# EAGLE board Qwiic RGB Sensor - BH1749-Panel (EAGLE 9.6.0), part 1 of 4
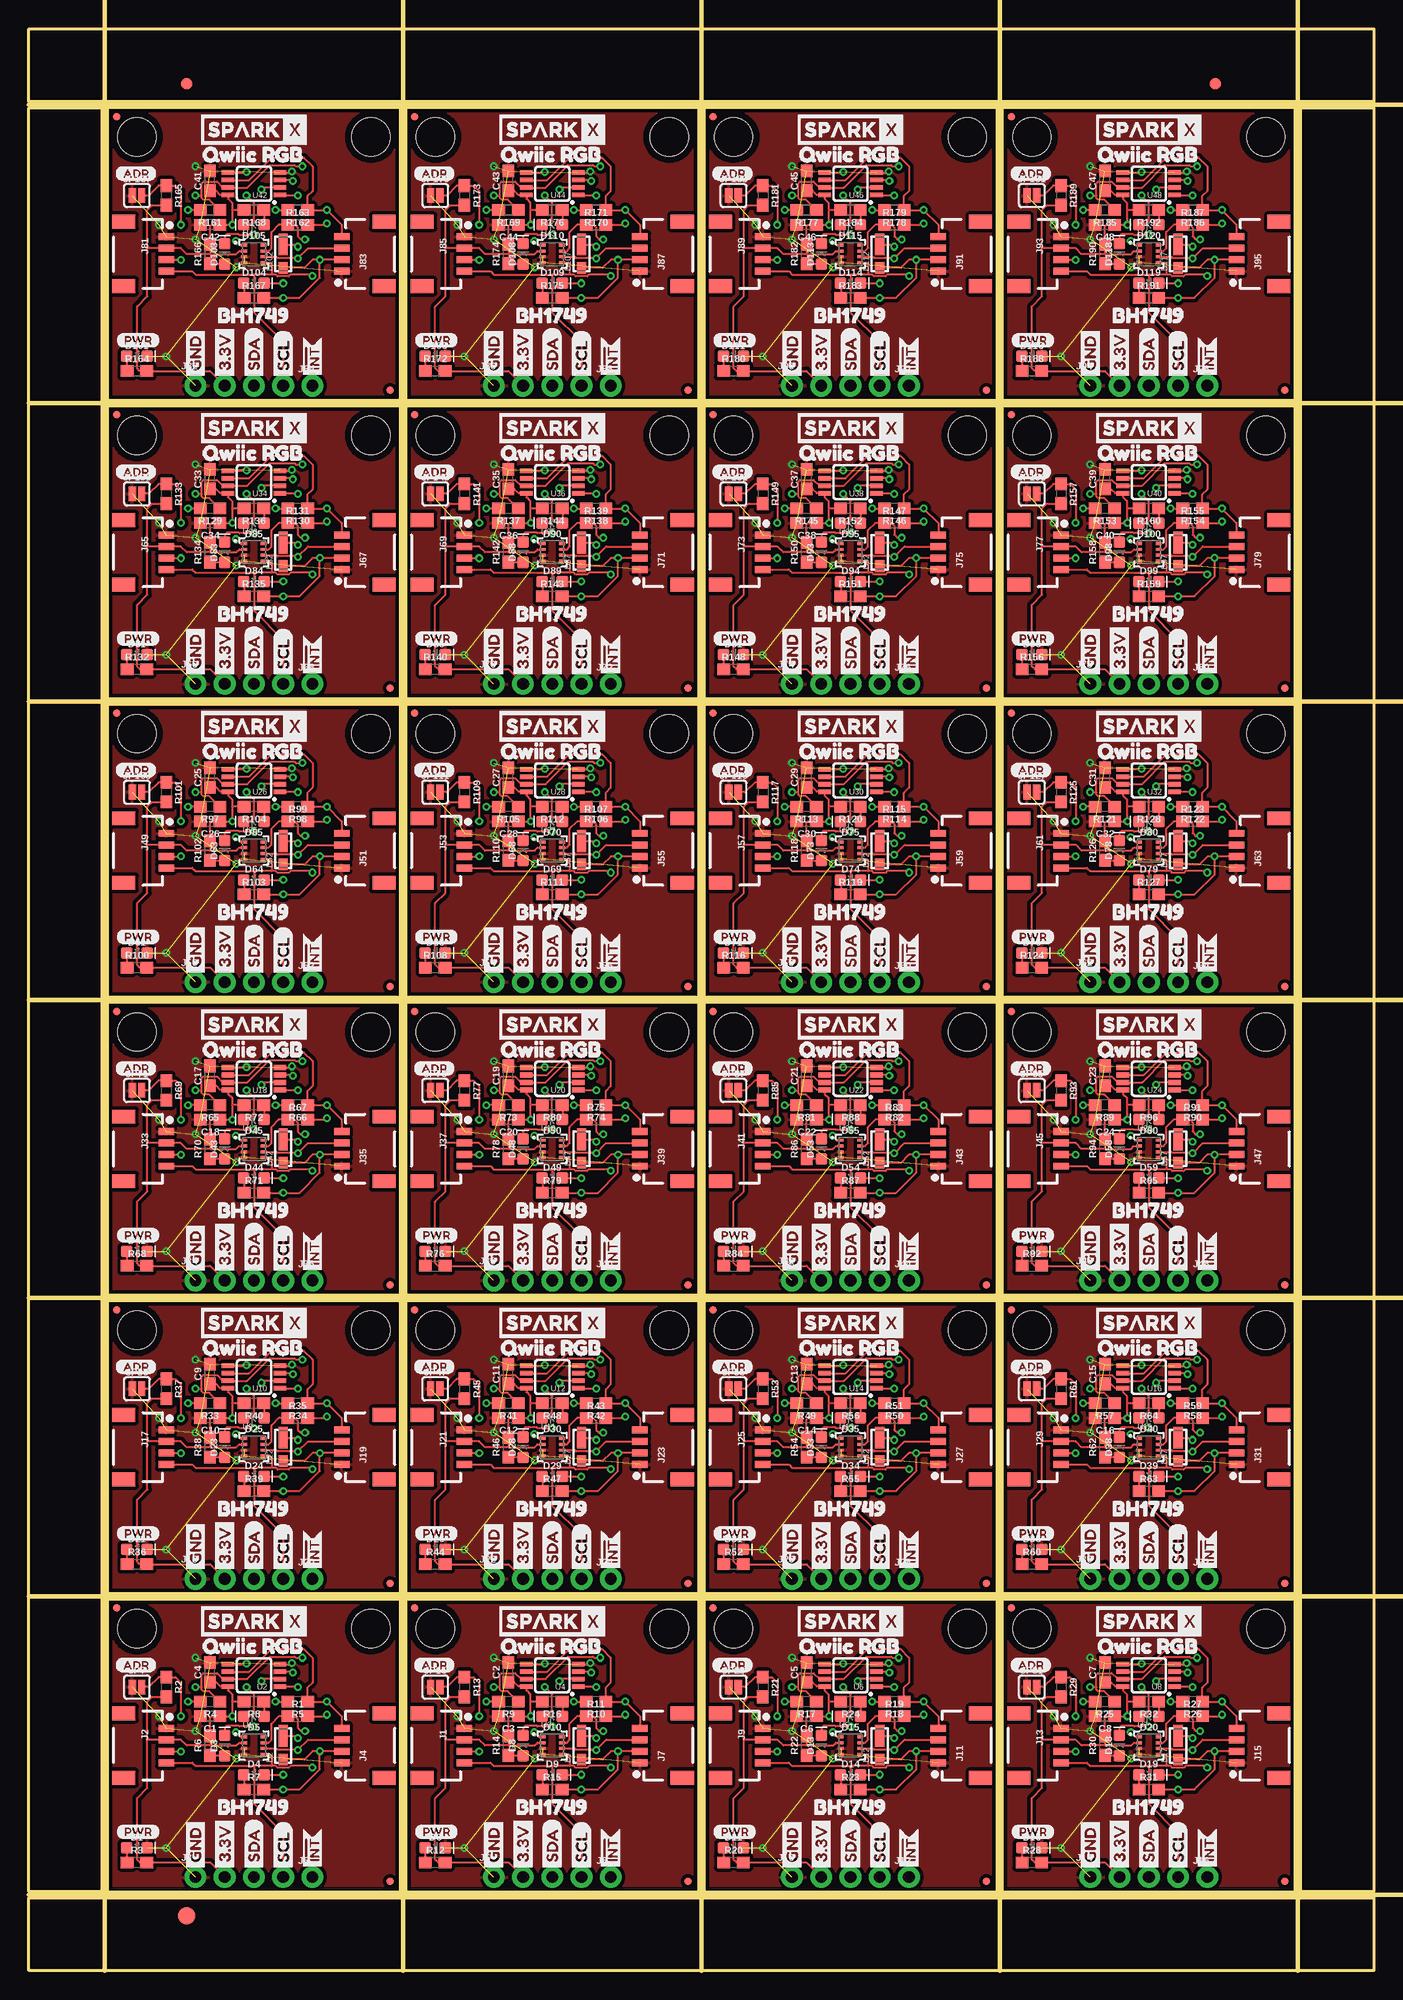
[diagram p0: board, top side]
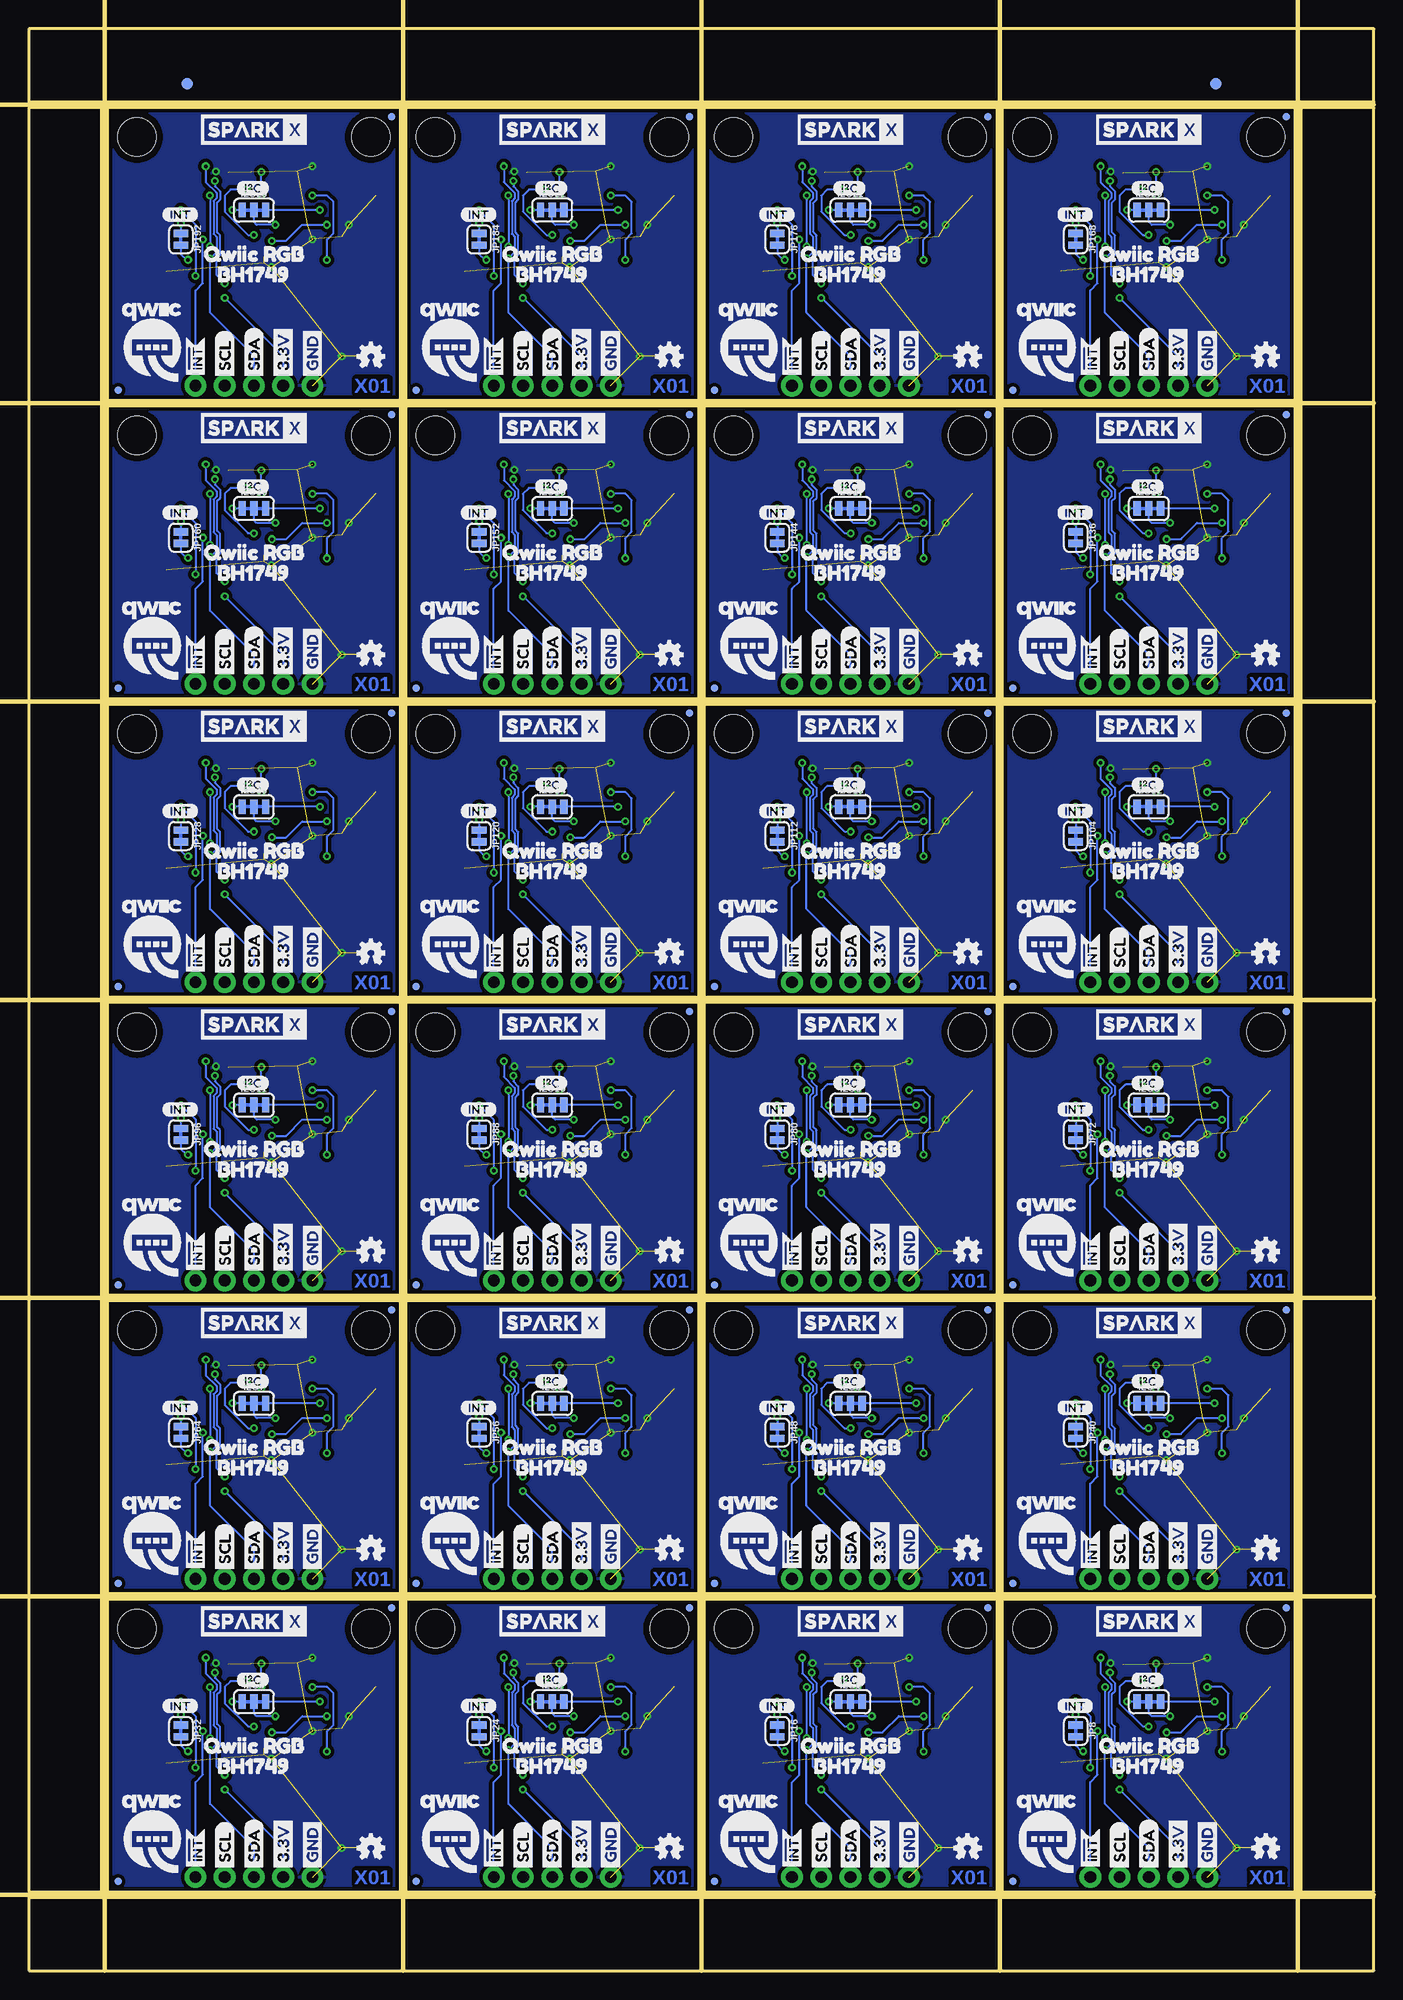
[diagram p1: board, bottom side, seen from below]

Size 116.84 x 168.66 mm. Coordinates in mm from the lower left corner, seen from the top.
Outline: 6.86,6.86 6.86,32.26 32.26,32.26 32.26,6.86 6.86,6.86
Outline: 32.77,6.86 32.77,32.26 58.17,32.26 58.17,6.86 32.77,6.86
Outline: 58.67,6.86 58.67,32.26 84.07,32.26 84.07,6.86 58.67,6.86
Outline: 84.58,6.86 84.58,32.26 109.98,32.26 109.98,6.86 84.58,6.86
Outline: 6.86,32.77 6.86,58.17 32.26,58.17 32.26,32.77 6.86,32.77
Outline: 32.77,32.77 32.77,58.17 58.17,58.17 58.17,32.77 32.77,32.77
Outline: 58.67,32.77 58.67,58.17 84.07,58.17 84.07,32.77 58.67,32.77
Outline: 84.58,32.77 84.58,58.17 109.98,58.17 109.98,32.77 84.58,32.77
Outline: 6.86,58.67 6.86,84.07 32.26,84.07 32.26,58.67 6.86,58.67
Outline: 32.77,58.67 32.77,84.07 58.17,84.07 58.17,58.67 32.77,58.67
Outline: 58.67,58.67 58.67,84.07 84.07,84.07 84.07,58.67 58.67,58.67
Outline: 84.58,58.67 84.58,84.07 109.98,84.07 109.98,58.67 84.58,58.67
Outline: 6.86,84.58 6.86,109.98 32.26,109.98 32.26,84.58 6.86,84.58
Outline: 32.77,84.58 32.77,109.98 58.17,109.98 58.17,84.58 32.77,84.58
Outline: 58.67,84.58 58.67,109.98 84.07,109.98 84.07,84.58 58.67,84.58
Outline: 84.58,84.58 84.58,109.98 109.98,109.98 109.98,84.58 84.58,84.58
Outline: 6.86,110.49 6.86,135.89 32.26,135.89 32.26,110.49 6.86,110.49
Outline: 32.77,110.49 32.77,135.89 58.17,135.89 58.17,110.49 32.77,110.49
Outline: 58.67,110.49 58.67,135.89 84.07,135.89 84.07,110.49 58.67,110.49
Outline: 84.58,110.49 84.58,135.89 109.98,135.89 109.98,110.49 84.58,110.49
Outline: 6.86,136.4 6.86,161.8 32.26,161.8 32.26,136.4 6.86,136.4
Outline: 32.77,136.4 32.77,161.8 58.17,161.8 58.17,136.4 32.77,136.4
Outline: 58.67,136.4 58.67,161.8 84.07,161.8 84.07,136.4 58.67,136.4
Outline: 84.58,136.4 84.58,161.8 109.98,161.8 109.98,136.4 84.58,136.4
Outline: 0,6.35 116.84,6.35 116.84,0 0,0 0,6.35
Outline: 110.49,161.8 116.84,161.8 116.84,6.86 110.49,6.86 110.49,161.8
Outline: 0,168.66 116.84,168.66 116.84,162.31 0,162.31 0,168.66
Outline: 0,161.8 6.35,161.8 6.35,6.86 0,6.86 0,161.8
Copper layers (1*16): Top 0.035mm / dielectric 1.5mm / Bottom 0.035mm
Design rules "Qwiic": minimum track width 6mil, minimum drill 0.3mm, track to track 6mil, track to pad 6mil, pad to pad 6mil, via to via 6mil, smd to smd 6mil, copper to edge 6mil, drill to drill 6mil, minimum pad ring 7mil, minimum via ring 7mil, stop-mask expansion 4mil, vias tented up to drill 25mil, thermal gap 10mil
Milling: 12 lines

## Footprints (pad centres in the part's own frame; a part is rotated, then mirrored left to right if it is on the bottom)
0603 = smd 1.1 x 1: 1 -0.85,0; 2 0.85,0
LED-0603 = smd 1 x 1: A -0.877,0; C 0.877,0
SUPER_BRIGHT_SMD_LED_1206 = smd 1 x 0.8: A -1.2,0 | smd 1.9 x 0.8: C 0.827,0
FIDUCIAL-1X2 = smd 1 x 1: 1 0,0
FIDUCIAL-1.5X3 = smd 1.5 x 1.5: 1 0,0
SMT-JUMPER_3_2-NC_TRACE_SILK = smd 0.635 x 1.27: 1 -1.016,0; 2 0,0; 3 1.016,0
1X04_1MM_RA = smd 0.6 x 1.35: 1 -1.5,0; 2 -0.5,0; 3 0.5,0; 4 1.5,0 | smd 1.2 x 2: NC1 2.8,-3.675; NC2 -2.8,-3.675
1X04_NO_SILK = drill 1.016 pad 1.88: 1 0,0; 2 2.54,0; 3 5.08,0; 4 7.62,0
1X01_NO_SILK = drill 1.016 pad 1.88: 1 0,0
MICRO-FIDUCIAL = smd 0.635 x 0.635: 1 0,0
STAND-OFF = hole 3.302: 0,0
SMT-JUMPER_2_NO_SILK = smd 0.635 x 1.27: 1 -0.406,0; 2 0.406,0
SMT-JUMPER_2_NC_TRACE_SILK = smd 0.635 x 1.27: 1 -0.508,0; 2 0.508,0
BH1749NUC = smd 0.5 x 0.25: 1 -0.85,0.75; 2 -0.85,0.25; 3 -0.85,-0.25; 4 -0.85,-0.75; 5 0.85,-0.75; 6 0.85,-0.25; 7 0.85,0.25; 8 0.85,0.75
MSOP8 = smd 1.1 x 0.4: 1 -2.25,0.975; 2 -2.25,0.325; 3 -2.25,-0.325; 4 -2.25,-0.975; 5 2.25,-0.975; 6 2.25,-0.325; 7 2.25,0.325; 8 2.25,0.975

## Placement (x,y rotation side)
C1  0.1uF  [0603]  15.75,22.1 180 top
C2  0.1uF  [0603]  41.66,25.91 90 top
C3  0.1uF  [0603]  41.66,22.1 180 top
C4  0.1uF  [0603]  15.75,25.91 90 top
C5  0.1uF  [0603]  67.56,25.91 90 top
C6  0.1uF  [0603]  67.56,22.1 180 top
C7  0.1uF  [0603]  93.47,25.91 90 top
C8  0.1uF  [0603]  93.47,22.1 180 top
C9  0.1uF  [0603]  15.75,51.82 90 top
C10  0.1uF  [0603]  15.75,48.01 180 top
C11  0.1uF  [0603]  41.66,51.82 90 top
C12  0.1uF  [0603]  41.66,48.01 180 top
C13  0.1uF  [0603]  67.56,51.82 90 top
C14  0.1uF  [0603]  67.56,48.01 180 top
C15  0.1uF  [0603]  93.47,51.82 90 top
C16  0.1uF  [0603]  93.47,48.01 180 top
C17  0.1uF  [0603]  15.75,77.72 90 top
C18  0.1uF  [0603]  15.75,73.91 180 top
C19  0.1uF  [0603]  41.66,77.72 90 top
C20  0.1uF  [0603]  41.66,73.91 180 top
C21  0.1uF  [0603]  67.56,77.72 90 top
C22  0.1uF  [0603]  67.56,73.91 180 top
C23  0.1uF  [0603]  93.47,77.72 90 top
C24  0.1uF  [0603]  93.47,73.91 180 top
C25  0.1uF  [0603]  15.75,103.63 90 top
C26  0.1uF  [0603]  15.75,99.82 180 top
C27  0.1uF  [0603]  41.66,103.63 90 top
C28  0.1uF  [0603]  41.66,99.82 180 top
C29  0.1uF  [0603]  67.56,103.63 90 top
C30  0.1uF  [0603]  67.56,99.82 180 top
C31  0.1uF  [0603]  93.47,103.63 90 top
C32  0.1uF  [0603]  93.47,99.82 180 top
C33  0.1uF  [0603]  15.75,129.54 90 top
C34  0.1uF  [0603]  15.75,125.73 180 top
C35  0.1uF  [0603]  41.66,129.54 90 top
C36  0.1uF  [0603]  41.66,125.73 180 top
C37  0.1uF  [0603]  67.56,129.54 90 top
C38  0.1uF  [0603]  67.56,125.73 180 top
C39  0.1uF  [0603]  93.47,129.54 90 top
C40  0.1uF  [0603]  93.47,125.73 180 top
C41  0.1uF  [0603]  15.75,155.45 90 top
C42  0.1uF  [0603]  15.75,151.64 180 top
C43  0.1uF  [0603]  41.66,155.45 90 top
C44  0.1uF  [0603]  41.66,151.64 180 top
C45  0.1uF  [0603]  67.56,155.45 90 top
C46  0.1uF  [0603]  67.56,151.64 180 top
C47  0.1uF  [0603]  93.47,155.45 90 top
C48  0.1uF  [0603]  93.47,151.64 180 top
D1  RED  [LED-0603]  9.4,10.67 0 top
D2  5700k  [SUPER_BRIGHT_SMD_LED_1206]  22.1,19.56 90 top
D3  RED  [LED-0603]  17.02,19.56 90 top
D4  GREEN  [LED-0603]  19.56,17.02 0 top
D5  BLUE  [LED-0603]  19.56,22.1 180 top
D6  RED  [LED-0603]  35.31,10.67 0 top
D7  5700k  [SUPER_BRIGHT_SMD_LED_1206]  48.01,19.56 90 top
D8  RED  [LED-0603]  42.93,19.56 90 top
D9  GREEN  [LED-0603]  45.47,17.02 0 top
D10  BLUE  [LED-0603]  45.47,22.1 180 top
D11  RED  [LED-0603]  61.21,10.67 0 top
D12  5700k  [SUPER_BRIGHT_SMD_LED_1206]  73.91,19.56 90 top
D13  RED  [LED-0603]  68.83,19.56 90 top
D14  GREEN  [LED-0603]  71.37,17.02 0 top
D15  BLUE  [LED-0603]  71.37,22.1 180 top
D16  RED  [LED-0603]  87.12,10.67 0 top
D17  5700k  [SUPER_BRIGHT_SMD_LED_1206]  99.82,19.56 90 top
D18  RED  [LED-0603]  94.74,19.56 90 top
D19  GREEN  [LED-0603]  97.28,17.02 0 top
D20  BLUE  [LED-0603]  97.28,22.1 180 top
D21  RED  [LED-0603]  9.4,36.58 0 top
D22  5700k  [SUPER_BRIGHT_SMD_LED_1206]  22.1,45.47 90 top
D23  RED  [LED-0603]  17.02,45.47 90 top
D24  GREEN  [LED-0603]  19.56,42.93 0 top
D25  BLUE  [LED-0603]  19.56,48.01 180 top
D26  RED  [LED-0603]  35.31,36.58 0 top
D27  5700k  [SUPER_BRIGHT_SMD_LED_1206]  48.01,45.47 90 top
D28  RED  [LED-0603]  42.93,45.47 90 top
D29  GREEN  [LED-0603]  45.47,42.93 0 top
D30  BLUE  [LED-0603]  45.47,48.01 180 top
D31  RED  [LED-0603]  61.21,36.58 0 top
D32  5700k  [SUPER_BRIGHT_SMD_LED_1206]  73.91,45.47 90 top
D33  RED  [LED-0603]  68.83,45.47 90 top
D34  GREEN  [LED-0603]  71.37,42.93 0 top
D35  BLUE  [LED-0603]  71.37,48.01 180 top
D36  RED  [LED-0603]  87.12,36.58 0 top
D37  5700k  [SUPER_BRIGHT_SMD_LED_1206]  99.82,45.47 90 top
D38  RED  [LED-0603]  94.74,45.47 90 top
D39  GREEN  [LED-0603]  97.28,42.93 0 top
D40  BLUE  [LED-0603]  97.28,48.01 180 top
D41  RED  [LED-0603]  9.4,62.48 0 top
D42  5700k  [SUPER_BRIGHT_SMD_LED_1206]  22.1,71.37 90 top
D43  RED  [LED-0603]  17.02,71.37 90 top
D44  GREEN  [LED-0603]  19.56,68.83 0 top
D45  BLUE  [LED-0603]  19.56,73.91 180 top
D46  RED  [LED-0603]  35.31,62.48 0 top
D47  5700k  [SUPER_BRIGHT_SMD_LED_1206]  48.01,71.37 90 top
D48  RED  [LED-0603]  42.93,71.37 90 top
D49  GREEN  [LED-0603]  45.47,68.83 0 top
D50  BLUE  [LED-0603]  45.47,73.91 180 top
D51  RED  [LED-0603]  61.21,62.48 0 top
D52  5700k  [SUPER_BRIGHT_SMD_LED_1206]  73.91,71.37 90 top
D53  RED  [LED-0603]  68.83,71.37 90 top
D54  GREEN  [LED-0603]  71.37,68.83 0 top
D55  BLUE  [LED-0603]  71.37,73.91 180 top
D56  RED  [LED-0603]  87.12,62.48 0 top
D57  5700k  [SUPER_BRIGHT_SMD_LED_1206]  99.82,71.37 90 top
D58  RED  [LED-0603]  94.74,71.37 90 top
D59  GREEN  [LED-0603]  97.28,68.83 0 top
D60  BLUE  [LED-0603]  97.28,73.91 180 top
D61  RED  [LED-0603]  9.4,88.39 0 top
D62  5700k  [SUPER_BRIGHT_SMD_LED_1206]  22.1,97.28 90 top
D63  RED  [LED-0603]  17.02,97.28 90 top
D64  GREEN  [LED-0603]  19.56,94.74 0 top
D65  BLUE  [LED-0603]  19.56,99.82 180 top
D66  RED  [LED-0603]  35.31,88.39 0 top
D67  5700k  [SUPER_BRIGHT_SMD_LED_1206]  48.01,97.28 90 top
D68  RED  [LED-0603]  42.93,97.28 90 top
D69  GREEN  [LED-0603]  45.47,94.74 0 top
D70  BLUE  [LED-0603]  45.47,99.82 180 top
D71  RED  [LED-0603]  61.21,88.39 0 top
D72  5700k  [SUPER_BRIGHT_SMD_LED_1206]  73.91,97.28 90 top
D73  RED  [LED-0603]  68.83,97.28 90 top
D74  GREEN  [LED-0603]  71.37,94.74 0 top
D75  BLUE  [LED-0603]  71.37,99.82 180 top
D76  RED  [LED-0603]  87.12,88.39 0 top
D77  5700k  [SUPER_BRIGHT_SMD_LED_1206]  99.82,97.28 90 top
D78  RED  [LED-0603]  94.74,97.28 90 top
D79  GREEN  [LED-0603]  97.28,94.74 0 top
D80  BLUE  [LED-0603]  97.28,99.82 180 top
D81  RED  [LED-0603]  9.4,114.3 0 top
D82  5700k  [SUPER_BRIGHT_SMD_LED_1206]  22.1,123.19 90 top
D83  RED  [LED-0603]  17.02,123.19 90 top
D84  GREEN  [LED-0603]  19.56,120.65 0 top
D85  BLUE  [LED-0603]  19.56,125.73 180 top
D86  RED  [LED-0603]  35.31,114.3 0 top
D87  5700k  [SUPER_BRIGHT_SMD_LED_1206]  48.01,123.19 90 top
D88  RED  [LED-0603]  42.93,123.19 90 top
D89  GREEN  [LED-0603]  45.47,120.65 0 top
D90  BLUE  [LED-0603]  45.47,125.73 180 top
D91  RED  [LED-0603]  61.21,114.3 0 top
D92  5700k  [SUPER_BRIGHT_SMD_LED_1206]  73.91,123.19 90 top
D93  RED  [LED-0603]  68.83,123.19 90 top
D94  GREEN  [LED-0603]  71.37,120.65 0 top
D95  BLUE  [LED-0603]  71.37,125.73 180 top
D96  RED  [LED-0603]  87.12,114.3 0 top
D97  5700k  [SUPER_BRIGHT_SMD_LED_1206]  99.82,123.19 90 top
D98  RED  [LED-0603]  94.74,123.19 90 top
D99  GREEN  [LED-0603]  97.28,120.65 0 top
D100  BLUE  [LED-0603]  97.28,125.73 180 top
D101  RED  [LED-0603]  9.4,140.21 0 top
D102  5700k  [SUPER_BRIGHT_SMD_LED_1206]  22.1,149.1 90 top
D103  RED  [LED-0603]  17.02,149.1 90 top
D104  GREEN  [LED-0603]  19.56,146.56 0 top
D105  BLUE  [LED-0603]  19.56,151.64 180 top
D106  RED  [LED-0603]  35.31,140.21 0 top
D107  5700k  [SUPER_BRIGHT_SMD_LED_1206]  48.01,149.1 90 top
D108  RED  [LED-0603]  42.93,149.1 90 top
D109  GREEN  [LED-0603]  45.47,146.56 0 top
D110  BLUE  [LED-0603]  45.47,151.64 180 top
D111  RED  [LED-0603]  61.21,140.21 0 top
D112  5700k  [SUPER_BRIGHT_SMD_LED_1206]  73.91,149.1 90 top
D113  RED  [LED-0603]  68.83,149.1 90 top
D114  GREEN  [LED-0603]  71.37,146.56 0 top
D115  BLUE  [LED-0603]  71.37,151.64 180 top
D116  RED  [LED-0603]  87.12,140.21 0 top
D117  5700k  [SUPER_BRIGHT_SMD_LED_1206]  99.82,149.1 90 top
D118  RED  [LED-0603]  94.74,149.1 90 top
D119  GREEN  [LED-0603]  97.28,146.56 0 top
D120  BLUE  [LED-0603]  97.28,151.64 180 top
E$1  [FIDUCIAL-1X2]  13.72,163.89 0 top
E$2  [FIDUCIAL-1X2]  13.72,163.89 0 bottom
E$3  [FIDUCIAL-1X2]  103.06,163.89 0 top
E$4  [FIDUCIAL-1X2]  103.06,163.89 0 bottom
E$5  [FIDUCIAL-1.5X3]  13.72,4.76 0 top
I2C  [SMT-JUMPER_3_2-NC_TRACE_SILK]  19.56,23.37 0 bottom
I2C1  [SMT-JUMPER_3_2-NC_TRACE_SILK]  45.47,23.37 0 bottom
I2C2  [SMT-JUMPER_3_2-NC_TRACE_SILK]  71.37,23.37 0 bottom
I2C3  [SMT-JUMPER_3_2-NC_TRACE_SILK]  97.28,23.37 0 bottom
I2C4  [SMT-JUMPER_3_2-NC_TRACE_SILK]  19.56,49.28 0 bottom
I2C5  [SMT-JUMPER_3_2-NC_TRACE_SILK]  45.47,49.28 0 bottom
I2C6  [SMT-JUMPER_3_2-NC_TRACE_SILK]  71.37,49.28 0 bottom
I2C7  [SMT-JUMPER_3_2-NC_TRACE_SILK]  97.28,49.28 0 bottom
I2C8  [SMT-JUMPER_3_2-NC_TRACE_SILK]  19.56,75.18 0 bottom
I2C9  [SMT-JUMPER_3_2-NC_TRACE_SILK]  45.47,75.18 0 bottom
I2C10  [SMT-JUMPER_3_2-NC_TRACE_SILK]  71.37,75.18 0 bottom
I2C11  [SMT-JUMPER_3_2-NC_TRACE_SILK]  97.28,75.18 0 bottom
I2C12  [SMT-JUMPER_3_2-NC_TRACE_SILK]  19.56,101.09 0 bottom
I2C13  [SMT-JUMPER_3_2-NC_TRACE_SILK]  45.47,101.09 0 bottom
I2C14  [SMT-JUMPER_3_2-NC_TRACE_SILK]  71.37,101.09 0 bottom
I2C15  [SMT-JUMPER_3_2-NC_TRACE_SILK]  97.28,101.09 0 bottom
I2C16  [SMT-JUMPER_3_2-NC_TRACE_SILK]  19.56,127 0 bottom
I2C17  [SMT-JUMPER_3_2-NC_TRACE_SILK]  45.47,127 0 bottom
I2C18  [SMT-JUMPER_3_2-NC_TRACE_SILK]  71.37,127 0 bottom
I2C19  [SMT-JUMPER_3_2-NC_TRACE_SILK]  97.28,127 0 bottom
I2C20  [SMT-JUMPER_3_2-NC_TRACE_SILK]  19.56,152.91 0 bottom
I2C21  [SMT-JUMPER_3_2-NC_TRACE_SILK]  45.47,152.91 0 bottom
I2C22  [SMT-JUMPER_3_2-NC_TRACE_SILK]  71.37,152.91 0 bottom
I2C23  [SMT-JUMPER_3_2-NC_TRACE_SILK]  97.28,152.91 0 bottom
J1  SMD  [1X04_1MM_RA]  37.85,19.56 270 top
J2  SMD  [1X04_1MM_RA]  11.94,19.56 270 top
J3  PTH  [1X04_NO_SILK]  14.48,8.13 0 top
J4  SMD  [1X04_1MM_RA]  27.18,19.56 90 top
J5  [1X01_NO_SILK]  24.64,8.13 0 top
J6  PTH  [1X04_NO_SILK]  40.39,8.13 0 top
J7  SMD  [1X04_1MM_RA]  53.09,19.56 90 top
J8  [1X01_NO_SILK]  50.55,8.13 0 top
J9  SMD  [1X04_1MM_RA]  63.75,19.56 270 top
J10  PTH  [1X04_NO_SILK]  66.29,8.13 0 top
J11  SMD  [1X04_1MM_RA]  78.99,19.56 90 top
J12  [1X01_NO_SILK]  76.45,8.13 0 top
J13  SMD  [1X04_1MM_RA]  89.66,19.56 270 top
J14  PTH  [1X04_NO_SILK]  92.2,8.13 0 top
J15  SMD  [1X04_1MM_RA]  104.9,19.56 90 top
J16  [1X01_NO_SILK]  102.36,8.13 0 top
J17  SMD  [1X04_1MM_RA]  11.94,45.47 270 top
J18  PTH  [1X04_NO_SILK]  14.48,34.04 0 top
J19  SMD  [1X04_1MM_RA]  27.18,45.47 90 top
J20  [1X01_NO_SILK]  24.64,34.04 0 top
J21  SMD  [1X04_1MM_RA]  37.85,45.47 270 top
J22  PTH  [1X04_NO_SILK]  40.39,34.04 0 top
J23  SMD  [1X04_1MM_RA]  53.09,45.47 90 top
J24  [1X01_NO_SILK]  50.55,34.04 0 top
J25  SMD  [1X04_1MM_RA]  63.75,45.47 270 top
J26  PTH  [1X04_NO_SILK]  66.29,34.04 0 top
J27  SMD  [1X04_1MM_RA]  78.99,45.47 90 top
J28  [1X01_NO_SILK]  76.45,34.04 0 top
J29  SMD  [1X04_1MM_RA]  89.66,45.47 270 top
J30  PTH  [1X04_NO_SILK]  92.2,34.04 0 top
J31  SMD  [1X04_1MM_RA]  104.9,45.47 90 top
J32  [1X01_NO_SILK]  102.36,34.04 0 top
J33  SMD  [1X04_1MM_RA]  11.94,71.37 270 top
J34  PTH  [1X04_NO_SILK]  14.48,59.94 0 top
J35  SMD  [1X04_1MM_RA]  27.18,71.37 90 top
J36  [1X01_NO_SILK]  24.64,59.94 0 top
J37  SMD  [1X04_1MM_RA]  37.85,71.37 270 top
J38  PTH  [1X04_NO_SILK]  40.39,59.94 0 top
J39  SMD  [1X04_1MM_RA]  53.09,71.37 90 top
J40  [1X01_NO_SILK]  50.55,59.94 0 top
J41  SMD  [1X04_1MM_RA]  63.75,71.37 270 top
J42  PTH  [1X04_NO_SILK]  66.29,59.94 0 top
J43  SMD  [1X04_1MM_RA]  78.99,71.37 90 top
J44  [1X01_NO_SILK]  76.45,59.94 0 top
J45  SMD  [1X04_1MM_RA]  89.66,71.37 270 top
J46  PTH  [1X04_NO_SILK]  92.2,59.94 0 top
J47  SMD  [1X04_1MM_RA]  104.9,71.37 90 top
J48  [1X01_NO_SILK]  102.36,59.94 0 top
J49  SMD  [1X04_1MM_RA]  11.94,97.28 270 top
J50  PTH  [1X04_NO_SILK]  14.48,85.85 0 top
J51  SMD  [1X04_1MM_RA]  27.18,97.28 90 top
J52  [1X01_NO_SILK]  24.64,85.85 0 top
J53  SMD  [1X04_1MM_RA]  37.85,97.28 270 top
J54  PTH  [1X04_NO_SILK]  40.39,85.85 0 top
J55  SMD  [1X04_1MM_RA]  53.09,97.28 90 top
J56  [1X01_NO_SILK]  50.55,85.85 0 top
J57  SMD  [1X04_1MM_RA]  63.75,97.28 270 top
J58  PTH  [1X04_NO_SILK]  66.29,85.85 0 top
J59  SMD  [1X04_1MM_RA]  78.99,97.28 90 top
J60  [1X01_NO_SILK]  76.45,85.85 0 top
J61  SMD  [1X04_1MM_RA]  89.66,97.28 270 top
J62  PTH  [1X04_NO_SILK]  92.2,85.85 0 top
J63  SMD  [1X04_1MM_RA]  104.9,97.28 90 top
J64  [1X01_NO_SILK]  102.36,85.85 0 top
J65  SMD  [1X04_1MM_RA]  11.94,123.19 270 top
J66  PTH  [1X04_NO_SILK]  14.48,111.76 0 top
J67  SMD  [1X04_1MM_RA]  27.18,123.19 90 top
J68  [1X01_NO_SILK]  24.64,111.76 0 top
J69  SMD  [1X04_1MM_RA]  37.85,123.19 270 top
J70  PTH  [1X04_NO_SILK]  40.39,111.76 0 top
J71  SMD  [1X04_1MM_RA]  53.09,123.19 90 top
J72  [1X01_NO_SILK]  50.55,111.76 0 top
J73  SMD  [1X04_1MM_RA]  63.75,123.19 270 top
J74  PTH  [1X04_NO_SILK]  66.29,111.76 0 top
J75  SMD  [1X04_1MM_RA]  78.99,123.19 90 top
J76  [1X01_NO_SILK]  76.45,111.76 0 top
J77  SMD  [1X04_1MM_RA]  89.66,123.19 270 top
J78  PTH  [1X04_NO_SILK]  92.2,111.76 0 top
J79  SMD  [1X04_1MM_RA]  104.9,123.19 90 top
J80  [1X01_NO_SILK]  102.36,111.76 0 top
J81  SMD  [1X04_1MM_RA]  11.94,149.1 270 top
J82  PTH  [1X04_NO_SILK]  14.48,137.67 0 top
J83  SMD  [1X04_1MM_RA]  27.18,149.1 90 top
J84  [1X01_NO_SILK]  24.64,137.67 0 top
J85  SMD  [1X04_1MM_RA]  37.85,149.1 270 top
J86  PTH  [1X04_NO_SILK]  40.39,137.67 0 top
J87  SMD  [1X04_1MM_RA]  53.09,149.1 90 top
J88  [1X01_NO_SILK]  50.55,137.67 0 top
J89  SMD  [1X04_1MM_RA]  63.75,149.1 270 top
J90  PTH  [1X04_NO_SILK]  66.29,137.67 0 top
J91  SMD  [1X04_1MM_RA]  78.99,149.1 90 top
J92  [1X01_NO_SILK]  76.45,137.67 0 top
J93  SMD  [1X04_1MM_RA]  89.66,149.1 270 top
J94  PTH  [1X04_NO_SILK]  92.2,137.67 0 top
J95  SMD  [1X04_1MM_RA]  104.9,149.1 90 top
J96  [1X01_NO_SILK]  102.36,137.67 0 top
JP1  FIDUCIALUFIDUCIAL  [MICRO-FIDUCIAL]  7.62,31.5 0 bottom
JP2  FIDUCIALUFIDUCIAL  [MICRO-FIDUCIAL]  31.37,7.75 0 top
JP3  STAND-OFF  [STAND-OFF]  9.4,29.72 0 top
JP4  STAND-OFF  [STAND-OFF]  29.72,29.72 0 top
JP5  FIDUCIALUFIDUCIAL  [MICRO-FIDUCIAL]  31.37,7.75 0 bottom
JP6  FIDUCIALUFIDUCIAL  [MICRO-FIDUCIAL]  7.62,31.5 0 top
JP7  ADR  [SMT-JUMPER_2_NO_SILK]  9.4,24.64 0 top
JP8  INT  [SMT-JUMPER_2_NC_TRACE_SILK]  25.91,20.83 270 bottom
JP9  STAND-OFF  [STAND-OFF]  35.31,29.72 0 top
JP10  STAND-OFF  [STAND-OFF]  55.63,29.72 0 top
JP11  FIDUCIALUFIDUCIAL  [MICRO-FIDUCIAL]  57.28,7.75 0 top
JP12  FIDUCIALUFIDUCIAL  [MICRO-FIDUCIAL]  33.53,31.5 0 top
JP13  FIDUCIALUFIDUCIAL  [MICRO-FIDUCIAL]  33.53,31.5 0 bottom
JP14  FIDUCIALUFIDUCIAL  [MICRO-FIDUCIAL]  57.28,7.75 0 bottom
JP15  ADR  [SMT-JUMPER_2_NO_SILK]  35.31,24.64 0 top
JP16  INT  [SMT-JUMPER_2_NC_TRACE_SILK]  51.82,20.83 270 bottom
JP17  STAND-OFF  [STAND-OFF]  61.21,29.72 0 top
JP18  STAND-OFF  [STAND-OFF]  81.53,29.72 0 top
JP19  FIDUCIALUFIDUCIAL  [MICRO-FIDUCIAL]  83.19,7.75 0 top
JP20  FIDUCIALUFIDUCIAL  [MICRO-FIDUCIAL]  59.44,31.5 0 top
JP21  FIDUCIALUFIDUCIAL  [MICRO-FIDUCIAL]  59.44,31.5 0 bottom
JP22  FIDUCIALUFIDUCIAL  [MICRO-FIDUCIAL]  83.19,7.75 0 bottom
JP23  ADR  [SMT-JUMPER_2_NO_SILK]  61.21,24.64 0 top
JP24  INT  [SMT-JUMPER_2_NC_TRACE_SILK]  77.72,20.83 270 bottom
JP25  STAND-OFF  [STAND-OFF]  87.12,29.72 0 top
JP26  STAND-OFF  [STAND-OFF]  107.44,29.72 0 top
JP27  FIDUCIALUFIDUCIAL  [MICRO-FIDUCIAL]  109.09,7.75 0 top
JP28  FIDUCIALUFIDUCIAL  [MICRO-FIDUCIAL]  85.34,31.5 0 top
JP29  FIDUCIALUFIDUCIAL  [MICRO-FIDUCIAL]  85.34,31.5 0 bottom
JP30  FIDUCIALUFIDUCIAL  [MICRO-FIDUCIAL]  109.09,7.75 0 bottom
JP31  ADR  [SMT-JUMPER_2_NO_SILK]  87.12,24.64 0 top
JP32  INT  [SMT-JUMPER_2_NC_TRACE_SILK]  103.63,20.83 270 bottom
JP33  STAND-OFF  [STAND-OFF]  9.4,55.63 0 top
JP34  STAND-OFF  [STAND-OFF]  29.72,55.63 0 top
JP35  FIDUCIALUFIDUCIAL  [MICRO-FIDUCIAL]  31.37,33.66 0 top
JP36  FIDUCIALUFIDUCIAL  [MICRO-FIDUCIAL]  7.62,57.4 0 top
JP37  FIDUCIALUFIDUCIAL  [MICRO-FIDUCIAL]  7.62,57.4 0 bottom
JP38  FIDUCIALUFIDUCIAL  [MICRO-FIDUCIAL]  31.37,33.66 0 bottom
JP39  ADR  [SMT-JUMPER_2_NO_SILK]  9.4,50.55 0 top
JP40  INT  [SMT-JUMPER_2_NC_TRACE_SILK]  25.91,46.74 270 bottom
JP41  STAND-OFF  [STAND-OFF]  35.31,55.63 0 top
JP42  STAND-OFF  [STAND-OFF]  55.63,55.63 0 top
JP43  FIDUCIALUFIDUCIAL  [MICRO-FIDUCIAL]  57.28,33.66 0 top
JP44  FIDUCIALUFIDUCIAL  [MICRO-FIDUCIAL]  33.53,57.4 0 top
JP45  FIDUCIALUFIDUCIAL  [MICRO-FIDUCIAL]  33.53,57.4 0 bottom
JP46  FIDUCIALUFIDUCIAL  [MICRO-FIDUCIAL]  57.28,33.66 0 bottom
JP47  ADR  [SMT-JUMPER_2_NO_SILK]  35.31,50.55 0 top
JP48  INT  [SMT-JUMPER_2_NC_TRACE_SILK]  51.82,46.74 270 bottom
JP49  STAND-OFF  [STAND-OFF]  61.21,55.63 0 top
JP50  STAND-OFF  [STAND-OFF]  81.53,55.63 0 top
JP51  FIDUCIALUFIDUCIAL  [MICRO-FIDUCIAL]  83.19,33.66 0 top
JP52  FIDUCIALUFIDUCIAL  [MICRO-FIDUCIAL]  59.44,57.4 0 top
JP53  FIDUCIALUFIDUCIAL  [MICRO-FIDUCIAL]  59.44,57.4 0 bottom
JP54  FIDUCIALUFIDUCIAL  [MICRO-FIDUCIAL]  83.19,33.66 0 bottom
JP55  ADR  [SMT-JUMPER_2_NO_SILK]  61.21,50.55 0 top
JP56  INT  [SMT-JUMPER_2_NC_TRACE_SILK]  77.72,46.74 270 bottom
JP57  STAND-OFF  [STAND-OFF]  87.12,55.63 0 top
JP58  STAND-OFF  [STAND-OFF]  107.44,55.63 0 top
JP59  FIDUCIALUFIDUCIAL  [MICRO-FIDUCIAL]  109.09,33.66 0 top
JP60  FIDUCIALUFIDUCIAL  [MICRO-FIDUCIAL]  85.34,57.4 0 top
JP61  FIDUCIALUFIDUCIAL  [MICRO-FIDUCIAL]  85.34,57.4 0 bottom
JP62  FIDUCIALUFIDUCIAL  [MICRO-FIDUCIAL]  109.09,33.66 0 bottom
JP63  ADR  [SMT-JUMPER_2_NO_SILK]  87.12,50.55 0 top
JP64  INT  [SMT-JUMPER_2_NC_TRACE_SILK]  103.63,46.74 270 bottom
JP65  STAND-OFF  [STAND-OFF]  9.4,81.53 0 top
JP66  STAND-OFF  [STAND-OFF]  29.72,81.53 0 top
JP67  FIDUCIALUFIDUCIAL  [MICRO-FIDUCIAL]  31.37,59.56 0 top
JP68  FIDUCIALUFIDUCIAL  [MICRO-FIDUCIAL]  7.62,83.31 0 top
JP69  FIDUCIALUFIDUCIAL  [MICRO-FIDUCIAL]  7.62,83.31 0 bottom
JP70  FIDUCIALUFIDUCIAL  [MICRO-FIDUCIAL]  31.37,59.56 0 bottom
JP71  ADR  [SMT-JUMPER_2_NO_SILK]  9.4,76.45 0 top
JP72  INT  [SMT-JUMPER_2_NC_TRACE_SILK]  25.91,72.64 270 bottom
JP73  STAND-OFF  [STAND-OFF]  35.31,81.53 0 top
JP74  STAND-OFF  [STAND-OFF]  55.63,81.53 0 top
JP75  FIDUCIALUFIDUCIAL  [MICRO-FIDUCIAL]  57.28,59.56 0 top
JP76  FIDUCIALUFIDUCIAL  [MICRO-FIDUCIAL]  33.53,83.31 0 top
JP77  FIDUCIALUFIDUCIAL  [MICRO-FIDUCIAL]  33.53,83.31 0 bottom
JP78  FIDUCIALUFIDUCIAL  [MICRO-FIDUCIAL]  57.28,59.56 0 bottom
JP79  ADR  [SMT-JUMPER_2_NO_SILK]  35.31,76.45 0 top
JP80  INT  [SMT-JUMPER_2_NC_TRACE_SILK]  51.82,72.64 270 bottom
JP81  STAND-OFF  [STAND-OFF]  61.21,81.53 0 top
JP82  STAND-OFF  [STAND-OFF]  81.53,81.53 0 top
JP83  FIDUCIALUFIDUCIAL  [MICRO-FIDUCIAL]  83.19,59.56 0 top
JP84  FIDUCIALUFIDUCIAL  [MICRO-FIDUCIAL]  59.44,83.31 0 top
JP85  FIDUCIALUFIDUCIAL  [MICRO-FIDUCIAL]  59.44,83.31 0 bottom
JP86  FIDUCIALUFIDUCIAL  [MICRO-FIDUCIAL]  83.19,59.56 0 bottom
JP87  ADR  [SMT-JUMPER_2_NO_SILK]  61.21,76.45 0 top
JP88  INT  [SMT-JUMPER_2_NC_TRACE_SILK]  77.72,72.64 270 bottom
JP89  STAND-OFF  [STAND-OFF]  87.12,81.53 0 top
JP90  STAND-OFF  [STAND-OFF]  107.44,81.53 0 top
JP91  FIDUCIALUFIDUCIAL  [MICRO-FIDUCIAL]  109.09,59.56 0 top
JP92  FIDUCIALUFIDUCIAL  [MICRO-FIDUCIAL]  85.34,83.31 0 top
JP93  FIDUCIALUFIDUCIAL  [MICRO-FIDUCIAL]  85.34,83.31 0 bottom
JP94  FIDUCIALUFIDUCIAL  [MICRO-FIDUCIAL]  109.09,59.56 0 bottom
JP95  ADR  [SMT-JUMPER_2_NO_SILK]  87.12,76.45 0 top
JP96  INT  [SMT-JUMPER_2_NC_TRACE_SILK]  103.63,72.64 270 bottom
JP97  STAND-OFF  [STAND-OFF]  9.4,107.44 0 top
JP98  STAND-OFF  [STAND-OFF]  29.72,107.44 0 top
JP99  FIDUCIALUFIDUCIAL  [MICRO-FIDUCIAL]  31.37,85.47 0 top
JP100  FIDUCIALUFIDUCIAL  [MICRO-FIDUCIAL]  7.62,109.22 0 top
JP101  FIDUCIALUFIDUCIAL  [MICRO-FIDUCIAL]  7.62,109.22 0 bottom
JP102  FIDUCIALUFIDUCIAL  [MICRO-FIDUCIAL]  31.37,85.47 0 bottom
JP103  ADR  [SMT-JUMPER_2_NO_SILK]  9.4,102.36 0 top
JP104  INT  [SMT-JUMPER_2_NC_TRACE_SILK]  25.91,98.55 270 bottom
JP105  STAND-OFF  [STAND-OFF]  35.31,107.44 0 top
JP106  STAND-OFF  [STAND-OFF]  55.63,107.44 0 top
JP107  FIDUCIALUFIDUCIAL  [MICRO-FIDUCIAL]  57.28,85.47 0 top
JP108  FIDUCIALUFIDUCIAL  [MICRO-FIDUCIAL]  33.53,109.22 0 top
JP109  FIDUCIALUFIDUCIAL  [MICRO-FIDUCIAL]  33.53,109.22 0 bottom
JP110  FIDUCIALUFIDUCIAL  [MICRO-FIDUCIAL]  57.28,85.47 0 bottom
JP111  ADR  [SMT-JUMPER_2_NO_SILK]  35.31,102.36 0 top
JP112  INT  [SMT-JUMPER_2_NC_TRACE_SILK]  51.82,98.55 270 bottom
JP113  STAND-OFF  [STAND-OFF]  61.21,107.44 0 top
JP114  STAND-OFF  [STAND-OFF]  81.53,107.44 0 top
JP115  FIDUCIALUFIDUCIAL  [MICRO-FIDUCIAL]  83.19,85.47 0 top
JP116  FIDUCIALUFIDUCIAL  [MICRO-FIDUCIAL]  59.44,109.22 0 top
JP117  FIDUCIALUFIDUCIAL  [MICRO-FIDUCIAL]  59.44,109.22 0 bottom
JP118  FIDUCIALUFIDUCIAL  [MICRO-FIDUCIAL]  83.19,85.47 0 bottom
JP119  ADR  [SMT-JUMPER_2_NO_SILK]  61.21,102.36 0 top
JP120  INT  [SMT-JUMPER_2_NC_TRACE_SILK]  77.72,98.55 270 bottom
JP121  STAND-OFF  [STAND-OFF]  87.12,107.44 0 top
JP122  STAND-OFF  [STAND-OFF]  107.44,107.44 0 top
JP123  FIDUCIALUFIDUCIAL  [MICRO-FIDUCIAL]  109.09,85.47 0 top
JP124  FIDUCIALUFIDUCIAL  [MICRO-FIDUCIAL]  85.34,109.22 0 top
JP125  FIDUCIALUFIDUCIAL  [MICRO-FIDUCIAL]  85.34,109.22 0 bottom
JP126  FIDUCIALUFIDUCIAL  [MICRO-FIDUCIAL]  109.09,85.47 0 bottom
JP127  ADR  [SMT-JUMPER_2_NO_SILK]  87.12,102.36 0 top
JP128  INT  [SMT-JUMPER_2_NC_TRACE_SILK]  103.63,98.55 270 bottom
JP129  STAND-OFF  [STAND-OFF]  9.4,133.35 0 top
JP130  STAND-OFF  [STAND-OFF]  29.72,133.35 0 top
JP131  FIDUCIALUFIDUCIAL  [MICRO-FIDUCIAL]  31.37,111.38 0 top
JP132  FIDUCIALUFIDUCIAL  [MICRO-FIDUCIAL]  7.62,135.13 0 top
JP133  FIDUCIALUFIDUCIAL  [MICRO-FIDUCIAL]  7.62,135.13 0 bottom
JP134  FIDUCIALUFIDUCIAL  [MICRO-FIDUCIAL]  31.37,111.38 0 bottom
JP135  ADR  [SMT-JUMPER_2_NO_SILK]  9.4,128.27 0 top
JP136  INT  [SMT-JUMPER_2_NC_TRACE_SILK]  25.91,124.46 270 bottom
JP137  STAND-OFF  [STAND-OFF]  35.31,133.35 0 top
JP138  STAND-OFF  [STAND-OFF]  55.63,133.35 0 top
JP139  FIDUCIALUFIDUCIAL  [MICRO-FIDUCIAL]  57.28,111.38 0 top
JP140  FIDUCIALUFIDUCIAL  [MICRO-FIDUCIAL]  33.53,135.13 0 top
JP141  FIDUCIALUFIDUCIAL  [MICRO-FIDUCIAL]  33.53,135.13 0 bottom
JP142  FIDUCIALUFIDUCIAL  [MICRO-FIDUCIAL]  57.28,111.38 0 bottom
JP143  ADR  [SMT-JUMPER_2_NO_SILK]  35.31,128.27 0 top
JP144  INT  [SMT-JUMPER_2_NC_TRACE_SILK]  51.82,124.46 270 bottom
JP145  STAND-OFF  [STAND-OFF]  61.21,133.35 0 top
JP146  STAND-OFF  [STAND-OFF]  81.53,133.35 0 top
JP147  FIDUCIALUFIDUCIAL  [MICRO-FIDUCIAL]  83.19,111.38 0 top
JP148  FIDUCIALUFIDUCIAL  [MICRO-FIDUCIAL]  59.44,135.13 0 top
JP149  FIDUCIALUFIDUCIAL  [MICRO-FIDUCIAL]  59.44,135.13 0 bottom
JP150  FIDUCIALUFIDUCIAL  [MICRO-FIDUCIAL]  83.19,111.38 0 bottom
JP151  ADR  [SMT-JUMPER_2_NO_SILK]  61.21,128.27 0 top
JP152  INT  [SMT-JUMPER_2_NC_TRACE_SILK]  77.72,124.46 270 bottom
JP153  STAND-OFF  [STAND-OFF]  87.12,133.35 0 top
JP154  STAND-OFF  [STAND-OFF]  107.44,133.35 0 top
JP155  FIDUCIALUFIDUCIAL  [MICRO-FIDUCIAL]  109.09,111.38 0 top
JP156  FIDUCIALUFIDUCIAL  [MICRO-FIDUCIAL]  85.34,135.13 0 top
JP157  FIDUCIALUFIDUCIAL  [MICRO-FIDUCIAL]  85.34,135.13 0 bottom
JP158  FIDUCIALUFIDUCIAL  [MICRO-FIDUCIAL]  109.09,111.38 0 bottom
JP159  ADR  [SMT-JUMPER_2_NO_SILK]  87.12,128.27 0 top
JP160  INT  [SMT-JUMPER_2_NC_TRACE_SILK]  103.63,124.46 270 bottom
JP161  STAND-OFF  [STAND-OFF]  9.4,159.26 0 top
JP162  STAND-OFF  [STAND-OFF]  29.72,159.26 0 top
JP163  FIDUCIALUFIDUCIAL  [MICRO-FIDUCIAL]  31.37,137.29 0 top
JP164  FIDUCIALUFIDUCIAL  [MICRO-FIDUCIAL]  7.62,161.04 0 top
JP165  FIDUCIALUFIDUCIAL  [MICRO-FIDUCIAL]  7.62,161.04 0 bottom
JP166  FIDUCIALUFIDUCIAL  [MICRO-FIDUCIAL]  31.37,137.29 0 bottom
JP167  ADR  [SMT-JUMPER_2_NO_SILK]  9.4,154.18 0 top
JP168  INT  [SMT-JUMPER_2_NC_TRACE_SILK]  25.91,150.37 270 bottom
JP169  STAND-OFF  [STAND-OFF]  35.31,159.26 0 top
JP170  STAND-OFF  [STAND-OFF]  55.63,159.26 0 top
JP171  FIDUCIALUFIDUCIAL  [MICRO-FIDUCIAL]  57.28,137.29 0 top
JP172  FIDUCIALUFIDUCIAL  [MICRO-FIDUCIAL]  33.53,161.04 0 top
JP173  FIDUCIALUFIDUCIAL  [MICRO-FIDUCIAL]  33.53,161.04 0 bottom
JP174  FIDUCIALUFIDUCIAL  [MICRO-FIDUCIAL]  57.28,137.29 0 bottom
JP175  ADR  [SMT-JUMPER_2_NO_SILK]  35.31,154.18 0 top
JP176  INT  [SMT-JUMPER_2_NC_TRACE_SILK]  51.82,150.37 270 bottom
JP177  STAND-OFF  [STAND-OFF]  61.21,159.26 0 top
JP178  STAND-OFF  [STAND-OFF]  81.53,159.26 0 top
JP179  FIDUCIALUFIDUCIAL  [MICRO-FIDUCIAL]  83.19,137.29 0 top
JP180  FIDUCIALUFIDUCIAL  [MICRO-FIDUCIAL]  59.44,161.04 0 top
JP181  FIDUCIALUFIDUCIAL  [MICRO-FIDUCIAL]  59.44,161.04 0 bottom
JP182  FIDUCIALUFIDUCIAL  [MICRO-FIDUCIAL]  83.19,137.29 0 bottom
JP183  ADR  [SMT-JUMPER_2_NO_SILK]  61.21,154.18 0 top
JP184  INT  [SMT-JUMPER_2_NC_TRACE_SILK]  77.72,150.37 270 bottom
JP185  STAND-OFF  [STAND-OFF]  87.12,159.26 0 top
JP186  STAND-OFF  [STAND-OFF]  107.44,159.26 0 top
JP187  FIDUCIALUFIDUCIAL  [MICRO-FIDUCIAL]  109.09,137.29 0 top
JP188  FIDUCIALUFIDUCIAL  [MICRO-FIDUCIAL]  85.34,161.04 0 top
JP189  FIDUCIALUFIDUCIAL  [MICRO-FIDUCIAL]  85.34,161.04 0 bottom
JP190  FIDUCIALUFIDUCIAL  [MICRO-FIDUCIAL]  109.09,137.29 0 bottom
JP191  ADR  [SMT-JUMPER_2_NO_SILK]  87.12,154.18 0 top
JP192  INT  [SMT-JUMPER_2_NC_TRACE_SILK]  103.63,150.37 270 bottom
LOGO1  OSHW-LOGOMINI  [OSHW-LOGO-MINI]  9.4,10.67 0 bottom
LOGO2  OSHW-LOGOMINI  [OSHW-LOGO-MINI]  35.31,10.67 0 bottom
LOGO3  OSHW-LOGOMINI  [OSHW-LOGO-MINI]  61.21,10.67 0 bottom
LOGO4  OSHW-LOGOMINI  [OSHW-LOGO-MINI]  87.12,10.67 0 bottom
LOGO5  OSHW-LOGOMINI  [OSHW-LOGO-MINI]  9.4,36.58 0 bottom
LOGO6  OSHW-LOGOMINI  [OSHW-LOGO-MINI]  35.31,36.58 0 bottom
LOGO7  OSHW-LOGOMINI  [OSHW-LOGO-MINI]  61.21,36.58 0 bottom
LOGO8  OSHW-LOGOMINI  [OSHW-LOGO-MINI]  87.12,36.58 0 bottom
LOGO9  OSHW-LOGOMINI  [OSHW-LOGO-MINI]  9.4,62.48 0 bottom
LOGO10  OSHW-LOGOMINI  [OSHW-LOGO-MINI]  35.31,62.48 0 bottom
LOGO11  OSHW-LOGOMINI  [OSHW-LOGO-MINI]  61.21,62.48 0 bottom
LOGO12  OSHW-LOGOMINI  [OSHW-LOGO-MINI]  87.12,62.48 0 bottom
LOGO13  OSHW-LOGOMINI  [OSHW-LOGO-MINI]  9.4,88.39 0 bottom
LOGO14  OSHW-LOGOMINI  [OSHW-LOGO-MINI]  35.31,88.39 0 bottom
LOGO15  OSHW-LOGOMINI  [OSHW-LOGO-MINI]  61.21,88.39 0 bottom
LOGO16  OSHW-LOGOMINI  [OSHW-LOGO-MINI]  87.12,88.39 0 bottom
LOGO17  OSHW-LOGOMINI  [OSHW-LOGO-MINI]  9.4,114.3 0 bottom
LOGO18  OSHW-LOGOMINI  [OSHW-LOGO-MINI]  35.31,114.3 0 bottom
LOGO19  OSHW-LOGOMINI  [OSHW-LOGO-MINI]  61.21,114.3 0 bottom
LOGO20  OSHW-LOGOMINI  [OSHW-LOGO-MINI]  87.12,114.3 0 bottom
LOGO21  OSHW-LOGOMINI  [OSHW-LOGO-MINI]  9.4,140.21 0 bottom
LOGO22  OSHW-LOGOMINI  [OSHW-LOGO-MINI]  35.31,140.21 0 bottom
LOGO23  OSHW-LOGOMINI  [OSHW-LOGO-MINI]  61.21,140.21 0 bottom
LOGO24  OSHW-LOGOMINI  [OSHW-LOGO-MINI]  87.12,140.21 0 bottom
R1  10k  [0603]  23.37,22.1 0 top
R2  10k  [0603]  11.94,24.64 270 top
R3  1k  [0603]  9.4,9.4 0 top
R4  2.2k  [0603]  15.75,23.37 180 top
R5  2.2k  [0603]  23.37,23.37 180 top
R6  330  [0603]  15.75,19.56 90 top
R7  330  [0603]  19.56,15.75 0 top
R8  330  [0603]  19.56,23.37 180 top
R9  2.2k  [0603]  41.66,23.37 180 top
R10  2.2k  [0603]  49.28,23.37 180 top
R11  10k  [0603]  49.28,22.1 0 top
R12  1k  [0603]  35.31,9.4 0 top
R13  10k  [0603]  37.85,24.64 270 top
R14  330  [0603]  41.66,19.56 90 top
R15  330  [0603]  45.47,15.75 0 top
R16  330  [0603]  45.47,23.37 180 top
R17  2.2k  [0603]  67.56,23.37 180 top
R18  2.2k  [0603]  75.18,23.37 180 top
R19  10k  [0603]  75.18,22.1 0 top
R20  1k  [0603]  61.21,9.4 0 top
R21  10k  [0603]  63.75,24.64 270 top
R22  330  [0603]  67.56,19.56 90 top
R23  330  [0603]  71.37,15.75 0 top
R24  330  [0603]  71.37,23.37 180 top
R25  2.2k  [0603]  93.47,23.37 180 top
R26  2.2k  [0603]  101.09,23.37 180 top
R27  10k  [0603]  101.09,22.1 0 top
R28  1k  [0603]  87.12,9.4 0 top
R29  10k  [0603]  89.66,24.64 270 top
R30  330  [0603]  93.47,19.56 90 top
R31  330  [0603]  97.28,15.75 0 top
R32  330  [0603]  97.28,23.37 180 top
R33  2.2k  [0603]  15.75,49.28 180 top
R34  2.2k  [0603]  23.37,49.28 180 top
R35  10k  [0603]  23.37,48.01 0 top
R36  1k  [0603]  9.4,35.31 0 top
R37  10k  [0603]  11.94,50.55 270 top
R38  330  [0603]  15.75,45.47 90 top
R39  330  [0603]  19.56,41.66 0 top
R40  330  [0603]  19.56,49.28 180 top
R41  2.2k  [0603]  41.66,49.28 180 top
R42  2.2k  [0603]  49.28,49.28 180 top
R43  10k  [0603]  49.28,48.01 0 top
R44  1k  [0603]  35.31,35.31 0 top
R45  10k  [0603]  37.85,50.55 270 top
R46  330  [0603]  41.66,45.47 90 top
R47  330  [0603]  45.47,41.66 0 top
R48  330  [0603]  45.47,49.28 180 top
R49  2.2k  [0603]  67.56,49.28 180 top
R50  2.2k  [0603]  75.18,49.28 180 top
R51  10k  [0603]  75.18,48.01 0 top
R52  1k  [0603]  61.21,35.31 0 top
R53  10k  [0603]  63.75,50.55 270 top
R54  330  [0603]  67.56,45.47 90 top
R55  330  [0603]  71.37,41.66 0 top
R56  330  [0603]  71.37,49.28 180 top
R57  2.2k  [0603]  93.47,49.28 180 top
R58  2.2k  [0603]  101.09,49.28 180 top
R59  10k  [0603]  101.09,48.01 0 top
R60  1k  [0603]  87.12,35.31 0 top
R61  10k  [0603]  89.66,50.55 270 top
R62  330  [0603]  93.47,45.47 90 top
R63  330  [0603]  97.28,41.66 0 top
R64  330  [0603]  97.28,49.28 180 top
R65  2.2k  [0603]  15.75,75.18 180 top
R66  2.2k  [0603]  23.37,75.18 180 top
R67  10k  [0603]  23.37,73.91 0 top
R68  1k  [0603]  9.4,61.21 0 top
R69  10k  [0603]  11.94,76.45 270 top
R70  330  [0603]  15.75,71.37 90 top
R71  330  [0603]  19.56,67.56 0 top
R72  330  [0603]  19.56,75.18 180 top
R73  2.2k  [0603]  41.66,75.18 180 top
R74  2.2k  [0603]  49.28,75.18 180 top
R75  10k  [0603]  49.28,73.91 0 top
R76  1k  [0603]  35.31,61.21 0 top
R77  10k  [0603]  37.85,76.45 270 top
R78  330  [0603]  41.66,71.37 90 top
R79  330  [0603]  45.47,67.56 0 top
R80  330  [0603]  45.47,75.18 180 top
R81  2.2k  [0603]  67.56,75.18 180 top
R82  2.2k  [0603]  75.18,75.18 180 top
R83  10k  [0603]  75.18,73.91 0 top
R84  1k  [0603]  61.21,61.21 0 top
R85  10k  [0603]  63.75,76.45 270 top
R86  330  [0603]  67.56,71.37 90 top
R87  330  [0603]  71.37,67.56 0 top
R88  330  [0603]  71.37,75.18 180 top
R89  2.2k  [0603]  93.47,75.18 180 top
R90  2.2k  [0603]  101.09,75.18 180 top
R91  10k  [0603]  101.09,73.91 0 top
R92  1k  [0603]  87.12,61.21 0 top
R93  10k  [0603]  89.66,76.45 270 top
R94  330  [0603]  93.47,71.37 90 top
R95  330  [0603]  97.28,67.56 0 top
R96  330  [0603]  97.28,75.18 180 top
R97  2.2k  [0603]  15.75,101.09 180 top
R98  2.2k  [0603]  23.37,101.09 180 top
R99  10k  [0603]  23.37,99.82 0 top
R100  1k  [0603]  9.4,87.12 0 top
R101  10k  [0603]  11.94,102.36 270 top
R102  330  [0603]  15.75,97.28 90 top
R103  330  [0603]  19.56,93.47 0 top
R104  330  [0603]  19.56,101.09 180 top
R105  2.2k  [0603]  41.66,101.09 180 top
R106  2.2k  [0603]  49.28,101.09 180 top
R107  10k  [0603]  49.28,99.82 0 top
R108  1k  [0603]  35.31,87.12 0 top
R109  10k  [0603]  37.85,102.36 270 top
R110  330  [0603]  41.66,97.28 90 top
R111  330  [0603]  45.47,93.47 0 top
R112  330  [0603]  45.47,101.09 180 top
R113  2.2k  [0603]  67.56,101.09 180 top
R114  2.2k  [0603]  75.18,101.09 180 top
R115  10k  [0603]  75.18,99.82 0 top
R116  1k  [0603]  61.21,87.12 0 top
R117  10k  [0603]  63.75,102.36 270 top
R118  330  [0603]  67.56,97.28 90 top
R119  330  [0603]  71.37,93.47 0 top
R120  330  [0603]  71.37,101.09 180 top
R121  2.2k  [0603]  93.47,101.09 180 top
R122  2.2k  [0603]  101.09,101.09 180 top
R123  10k  [0603]  101.09,99.82 0 top
R124  1k  [0603]  87.12,87.12 0 top
R125  10k  [0603]  89.66,102.36 270 top
R126  330  [0603]  93.47,97.28 90 top
R127  330  [0603]  97.28,93.47 0 top
R128  330  [0603]  97.28,101.09 180 top
R129  2.2k  [0603]  15.75,127 180 top
R130  2.2k  [0603]  23.37,127 180 top
R131  10k  [0603]  23.37,125.73 0 top
R132  1k  [0603]  9.4,113.03 0 top
R133  10k  [0603]  11.94,128.27 270 top
R134  330  [0603]  15.75,123.19 90 top
R135  330  [0603]  19.56,119.38 0 top
R136  330  [0603]  19.56,127 180 top
R137  2.2k  [0603]  41.66,127 180 top
R138  2.2k  [0603]  49.28,127 180 top
R139  10k  [0603]  49.28,125.73 0 top
R140  1k  [0603]  35.31,113.03 0 top
R141  10k  [0603]  37.85,128.27 270 top
R142  330  [0603]  41.66,123.19 90 top
R143  330  [0603]  45.47,119.38 0 top
R144  330  [0603]  45.47,127 180 top
R145  2.2k  [0603]  67.56,127 180 top
R146  2.2k  [0603]  75.18,127 180 top
R147  10k  [0603]  75.18,125.73 0 top
R148  1k  [0603]  61.21,113.03 0 top
R149  10k  [0603]  63.75,128.27 270 top
R150  330  [0603]  67.56,123.19 90 top
R151  330  [0603]  71.37,119.38 0 top
R152  330  [0603]  71.37,127 180 top
R153  2.2k  [0603]  93.47,127 180 top
R154  2.2k  [0603]  101.09,127 180 top
R155  10k  [0603]  101.09,125.73 0 top
R156  1k  [0603]  87.12,113.03 0 top
R157  10k  [0603]  89.66,128.27 270 top
R158  330  [0603]  93.47,123.19 90 top
R159  330  [0603]  97.28,119.38 0 top
R160  330  [0603]  97.28,127 180 top
R161  2.2k  [0603]  15.75,152.91 180 top
R162  2.2k  [0603]  23.37,152.91 180 top
R163  10k  [0603]  23.37,151.64 0 top
R164  1k  [0603]  9.4,138.94 0 top
R165  10k  [0603]  11.94,154.18 270 top
R166  330  [0603]  15.75,149.1 90 top
R167  330  [0603]  19.56,145.29 0 top
R168  330  [0603]  19.56,152.91 180 top
R169  2.2k  [0603]  41.66,152.91 180 top
R170  2.2k  [0603]  49.28,152.91 180 top
R171  10k  [0603]  49.28,151.64 0 top
R172  1k  [0603]  35.31,138.94 0 top
R173  10k  [0603]  37.85,154.18 270 top
R174  330  [0603]  41.66,149.1 90 top
R175  330  [0603]  45.47,145.29 0 top
R176  330  [0603]  45.47,152.91 180 top
R177  2.2k  [0603]  67.56,152.91 180 top
R178  2.2k  [0603]  75.18,152.91 180 top
R179  10k  [0603]  75.18,151.64 0 top
R180  1k  [0603]  61.21,138.94 0 top
R181  10k  [0603]  63.75,154.18 270 top
R182  330  [0603]  67.56,149.1 90 top
R183  330  [0603]  71.37,145.29 0 top
R184  330  [0603]  71.37,152.91 180 top
R185  2.2k  [0603]  93.47,152.91 180 top
R186  2.2k  [0603]  101.09,152.91 180 top
R187  10k  [0603]  101.09,151.64 0 top
R188  1k  [0603]  87.12,138.94 0 top
R189  10k  [0603]  89.66,154.18 270 top
R190  330  [0603]  93.47,149.1 90 top
R191  330  [0603]  97.28,145.29 0 top
R192  330  [0603]  97.28,152.91 180 top
U1  BH1749NUC  [BH1749NUC]  19.56,19.56 0 top
U2  PCA9536  [MSOP8]  19.56,25.65 180 top
U3  BH1749NUC  [BH1749NUC]  45.47,19.56 0 top
U4  PCA9536  [MSOP8]  45.47,25.65 180 top
U5  BH1749NUC  [BH1749NUC]  71.37,19.56 0 top
U6  PCA9536  [MSOP8]  71.37,25.65 180 top
U7  BH1749NUC  [BH1749NUC]  97.28,19.56 0 top
U8  PCA9536  [MSOP8]  97.28,25.65 180 top
U9  BH1749NUC  [BH1749NUC]  19.56,45.47 0 top
U10  PCA9536  [MSOP8]  19.56,51.56 180 top
U11  BH1749NUC  [BH1749NUC]  45.47,45.47 0 top
U12  PCA9536  [MSOP8]  45.47,51.56 180 top
U13  BH1749NUC  [BH1749NUC]  71.37,45.47 0 top
U14  PCA9536  [MSOP8]  71.37,51.56 180 top
U15  BH1749NUC  [BH1749NUC]  97.28,45.47 0 top
U16  PCA9536  [MSOP8]  97.28,51.56 180 top
U17  BH1749NUC  [BH1749NUC]  19.56,71.37 0 top
U18  PCA9536  [MSOP8]  19.56,77.47 180 top
U19  BH1749NUC  [BH1749NUC]  45.47,71.37 0 top
U20  PCA9536  [MSOP8]  45.47,77.47 180 top
U21  BH1749NUC  [BH1749NUC]  71.37,71.37 0 top
U22  PCA9536  [MSOP8]  71.37,77.47 180 top
U23  BH1749NUC  [BH1749NUC]  97.28,71.37 0 top
U24  PCA9536  [MSOP8]  97.28,77.47 180 top
U25  BH1749NUC  [BH1749NUC]  19.56,97.28 0 top
U26  PCA9536  [MSOP8]  19.56,103.38 180 top
U27  BH1749NUC  [BH1749NUC]  45.47,97.28 0 top
U28  PCA9536  [MSOP8]  45.47,103.38 180 top
U29  BH1749NUC  [BH1749NUC]  71.37,97.28 0 top
U30  PCA9536  [MSOP8]  71.37,103.38 180 top
U31  BH1749NUC  [BH1749NUC]  97.28,97.28 0 top
U32  PCA9536  [MSOP8]  97.28,103.38 180 top
U33  BH1749NUC  [BH1749NUC]  19.56,123.19 0 top
U34  PCA9536  [MSOP8]  19.56,129.29 180 top
U35  BH1749NUC  [BH1749NUC]  45.47,123.19 0 top
U36  PCA9536  [MSOP8]  45.47,129.29 180 top
U37  BH1749NUC  [BH1749NUC]  71.37,123.19 0 top
U38  PCA9536  [MSOP8]  71.37,129.29 180 top
U39  BH1749NUC  [BH1749NUC]  97.28,123.19 0 top
U40  PCA9536  [MSOP8]  97.28,129.29 180 top
U41  BH1749NUC  [BH1749NUC]  19.56,149.1 0 top
U42  PCA9536  [MSOP8]  19.56,155.19 180 top
U43  BH1749NUC  [BH1749NUC]  45.47,149.1 0 top
U44  PCA9536  [MSOP8]  45.47,155.19 180 top
U45  BH1749NUC  [BH1749NUC]  71.37,149.1 0 top
U46  PCA9536  [MSOP8]  71.37,155.19 180 top
U47  BH1749NUC  [BH1749NUC]  97.28,149.1 0 top
U48  PCA9536  [MSOP8]  97.28,155.19 180 top
U$1  SPARKX-LOGO4  [SPARKX-MEDIUM]  19.56,30.35 0 top
U$2  SPARKX-LOGO4  [SPARKX-MEDIUM]  19.56,30.35 0 bottom
U$3  [GND1]  14.48,8.51 90 bottom
U$4  [3#3V2]  17.02,8.51 90 bottom
U$5  [SDA8]  19.56,8.51 90 bottom
U$6  [SCL9]  22.1,8.51 90 bottom
U$7  [INT#-[<]  24.64,8.38 90 bottom
U$8  [QWIIC-LOGO-MEDIUM]  28.45,11.94 0 bottom
U$9  [INT#-[<]  24.64,8.38 90 top
U$10  [I_SUPER2_C-()-03]  21.08,25.27 0 bottom
U$11  [BH17493]  23.88,17.78 0 bottom
U$12  [QWIIC_RGB2]  25.02,19.56 0 bottom
U$13  [BH17493]  15.24,14.22 0 top
U$14  SPARKX-LOGO4  [SPARKX-MEDIUM]  45.47,30.35 0 bottom
U$15  SPARKX-LOGO4  [SPARKX-MEDIUM]  45.47,30.35 0 top
U$16  [PWR-()-03]  7.62,12.06 0 top
U$17  [ADR-()-03]  7.49,26.54 0 top
U$18  [3#3V2]  42.93,8.51 90 top
U$19  [GND1]  40.39,8.51 90 top
U$20  [INT0]  27.56,22.99 0 bottom
U$21  [3#3V2]  17.02,8.51 90 top
U$22  [GND1]  14.48,8.51 90 top
U$23  [SCL9]  48.01,8.51 90 top
U$24  [QWIIC_RGB2]  13.97,28.19 0 top
U$25  [SDA8]  45.47,8.51 90 top
U$26  [SCL9]  22.1,8.51 90 top
U$27  [SDA8]  19.56,8.51 90 top
U$28  [GND1]  40.39,8.51 90 bottom
U$29  [3#3V2]  42.93,8.51 90 bottom
U$30  [SDA8]  45.47,8.51 90 bottom
U$31  [SCL9]  48.01,8.51 90 bottom
U$32  [QWIIC-LOGO-MEDIUM]  54.36,11.94 0 bottom
U$33  [INT#-[<]  50.55,8.38 90 top
U$34  [INT#-[<]  50.55,8.38 90 bottom
U$35  [PWR-()-03]  33.53,12.06 0 top
U$36  [ADR-()-03]  33.4,26.54 0 top
U$37  [I_SUPER2_C-()-03]  46.99,25.27 0 bottom
U$38  [BH17493]  49.78,17.78 0 bottom
U$39  [INT0]  53.47,22.99 0 bottom
U$40  [QWIIC_RGB2]  39.88,28.19 0 top
U$41  [QWIIC_RGB2]  50.93,19.56 0 bottom
U$42  [BH17493]  41.15,14.22 0 top
U$43  SPARKX-LOGO4  [SPARKX-MEDIUM]  71.37,30.35 0 bottom
U$44  SPARKX-LOGO4  [SPARKX-MEDIUM]  71.37,30.35 0 top
U$45  [3#3V2]  68.83,8.51 90 top
U$46  [GND1]  66.29,8.51 90 top
U$47  [SCL9]  73.91,8.51 90 top
U$48  [SDA8]  71.37,8.51 90 top
U$49  [GND1]  66.29,8.51 90 bottom
U$50  [3#3V2]  68.83,8.51 90 bottom
U$51  [SDA8]  71.37,8.51 90 bottom
U$52  [SCL9]  73.91,8.51 90 bottom
U$53  [QWIIC-LOGO-MEDIUM]  80.26,11.94 0 bottom
U$54  [INT#-[<]  76.45,8.38 90 top
U$55  [INT#-[<]  76.45,8.38 90 bottom
U$56  [PWR-()-03]  59.44,12.06 0 top
U$57  [ADR-()-03]  59.31,26.54 0 top
U$58  [I_SUPER2_C-()-03]  72.9,25.27 0 bottom
U$59  [BH17493]  75.69,17.78 0 bottom
U$60  [INT0]  79.38,22.99 0 bottom
U$61  [QWIIC_RGB2]  65.79,28.19 0 top
U$62  [QWIIC_RGB2]  76.84,19.56 0 bottom
U$63  [BH17493]  67.06,14.22 0 top
U$64  SPARKX-LOGO4  [SPARKX-MEDIUM]  97.28,30.35 0 bottom
U$65  SPARKX-LOGO4  [SPARKX-MEDIUM]  97.28,30.35 0 top
U$66  [3#3V2]  94.74,8.51 90 top
U$67  [GND1]  92.2,8.51 90 top
U$68  [SCL9]  99.82,8.51 90 top
U$69  [SDA8]  97.28,8.51 90 top
U$70  [GND1]  92.2,8.51 90 bottom
U$71  [3#3V2]  94.74,8.51 90 bottom
U$72  [SDA8]  97.28,8.51 90 bottom
U$73  [SCL9]  99.82,8.51 90 bottom
U$74  [QWIIC-LOGO-MEDIUM]  106.17,11.94 0 bottom
U$75  [INT#-[<]  102.36,8.38 90 top
U$76  [INT#-[<]  102.36,8.38 90 bottom
U$77  [PWR-()-03]  85.34,12.06 0 top
U$78  [ADR-()-03]  85.22,26.54 0 top
U$79  [I_SUPER2_C-()-03]  98.81,25.27 0 bottom
U$80  [BH17493]  101.6,17.78 0 bottom
U$81  [INT0]  105.28,22.99 0 bottom
U$82  [QWIIC_RGB2]  91.69,28.19 0 top
U$83  [QWIIC_RGB2]  102.74,19.56 0 bottom
U$84  [BH17493]  92.96,14.22 0 top
U$85  SPARKX-LOGO4  [SPARKX-MEDIUM]  19.56,56.26 0 bottom
U$86  SPARKX-LOGO4  [SPARKX-MEDIUM]  19.56,56.26 0 top
U$87  [3#3V2]  17.02,34.42 90 top
U$88  [GND1]  14.48,34.42 90 top
U$89  [SCL9]  22.1,34.42 90 top
U$90  [SDA8]  19.56,34.42 90 top
U$91  [GND1]  14.48,34.42 90 bottom
U$92  [3#3V2]  17.02,34.42 90 bottom
U$93  [SDA8]  19.56,34.42 90 bottom
U$94  [SCL9]  22.1,34.42 90 bottom
U$95  [QWIIC-LOGO-MEDIUM]  28.45,37.85 0 bottom
U$96  [INT#-[<]  24.64,34.29 90 top
U$97  [INT#-[<]  24.64,34.29 90 bottom
U$98  [PWR-()-03]  7.62,37.97 0 top
U$99  [ADR-()-03]  7.49,52.45 0 top
U$100  [I_SUPER2_C-()-03]  21.08,51.18 0 bottom
U$101  [BH17493]  23.88,43.69 0 bottom
U$102  [INT0]  27.56,48.89 0 bottom
U$103  [QWIIC_RGB2]  13.97,54.1 0 top
U$104  [QWIIC_RGB2]  25.02,45.47 0 bottom
U$105  [BH17493]  15.24,40.13 0 top
U$106  SPARKX-LOGO4  [SPARKX-MEDIUM]  45.47,56.26 0 bottom
U$107  SPARKX-LOGO4  [SPARKX-MEDIUM]  45.47,56.26 0 top
U$108  [3#3V2]  42.93,34.42 90 top
U$109  [GND1]  40.39,34.42 90 top
U$110  [SCL9]  48.01,34.42 90 top
U$111  [SDA8]  45.47,34.42 90 top
U$112  [GND1]  40.39,34.42 90 bottom
U$113  [3#3V2]  42.93,34.42 90 bottom
U$114  [SDA8]  45.47,34.42 90 bottom
U$115  [SCL9]  48.01,34.42 90 bottom
U$116  [QWIIC-LOGO-MEDIUM]  54.36,37.85 0 bottom
U$117  [INT#-[<]  50.55,34.29 90 top
U$118  [INT#-[<]  50.55,34.29 90 bottom
U$119  [PWR-()-03]  33.53,37.97 0 top
U$120  [ADR-()-03]  33.4,52.45 0 top
U$121  [I_SUPER2_C-()-03]  46.99,51.18 0 bottom
U$122  [BH17493]  49.78,43.69 0 bottom
U$123  [INT0]  53.47,48.89 0 bottom
U$124  [QWIIC_RGB2]  39.88,54.1 0 top
U$125  [QWIIC_RGB2]  50.93,45.47 0 bottom
U$126  [BH17493]  41.15,40.13 0 top
U$127  SPARKX-LOGO4  [SPARKX-MEDIUM]  71.37,56.26 0 bottom
U$128  SPARKX-LOGO4  [SPARKX-MEDIUM]  71.37,56.26 0 top
U$129  [3#3V2]  68.83,34.42 90 top
U$130  [GND1]  66.29,34.42 90 top
U$131  [SCL9]  73.91,34.42 90 top
U$132  [SDA8]  71.37,34.42 90 top
U$133  [GND1]  66.29,34.42 90 bottom
U$134  [3#3V2]  68.83,34.42 90 bottom
U$135  [SDA8]  71.37,34.42 90 bottom
U$136  [SCL9]  73.91,34.42 90 bottom
U$137  [QWIIC-LOGO-MEDIUM]  80.26,37.85 0 bottom
U$138  [INT#-[<]  76.45,34.29 90 top
U$139  [INT#-[<]  76.45,34.29 90 bottom
U$140  [PWR-()-03]  59.44,37.97 0 top
U$141  [ADR-()-03]  59.31,52.45 0 top
U$142  [I_SUPER2_C-()-03]  72.9,51.18 0 bottom
U$143  [BH17493]  75.69,43.69 0 bottom
U$144  [INT0]  79.38,48.89 0 bottom
U$145  [QWIIC_RGB2]  65.79,54.1 0 top
U$146  [QWIIC_RGB2]  76.84,45.47 0 bottom
U$147  [BH17493]  67.06,40.13 0 top
U$148  SPARKX-LOGO4  [SPARKX-MEDIUM]  97.28,56.26 0 bottom
U$149  SPARKX-LOGO4  [SPARKX-MEDIUM]  97.28,56.26 0 top
U$150  [3#3V2]  94.74,34.42 90 top
U$151  [GND1]  92.2,34.42 90 top
U$152  [SCL9]  99.82,34.42 90 top
U$153  [SDA8]  97.28,34.42 90 top
U$154  [GND1]  92.2,34.42 90 bottom
U$155  [3#3V2]  94.74,34.42 90 bottom
U$156  [SDA8]  97.28,34.42 90 bottom
U$157  [SCL9]  99.82,34.42 90 bottom
U$158  [QWIIC-LOGO-MEDIUM]  106.17,37.85 0 bottom
U$159  [INT#-[<]  102.36,34.29 90 top
U$160  [INT#-[<]  102.36,34.29 90 bottom
U$161  [PWR-()-03]  85.34,37.97 0 top
U$162  [ADR-()-03]  85.22,52.45 0 top
U$163  [I_SUPER2_C-()-03]  98.81,51.18 0 bottom
U$164  [BH17493]  101.6,43.69 0 bottom
U$165  [INT0]  105.28,48.89 0 bottom
U$166  [QWIIC_RGB2]  91.69,54.1 0 top
U$167  [QWIIC_RGB2]  102.74,45.47 0 bottom
U$168  [BH17493]  92.96,40.13 0 top
U$169  SPARKX-LOGO4  [SPARKX-MEDIUM]  19.56,82.17 0 bottom
U$170  SPARKX-LOGO4  [SPARKX-MEDIUM]  19.56,82.17 0 top
U$171  [3#3V2]  17.02,60.32 90 top
U$172  [GND1]  14.48,60.32 90 top
U$173  [SCL9]  22.1,60.32 90 top
U$174  [SDA8]  19.56,60.32 90 top
U$175  [GND1]  14.48,60.32 90 bottom
U$176  [3#3V2]  17.02,60.32 90 bottom
U$177  [SDA8]  19.56,60.32 90 bottom
U$178  [SCL9]  22.1,60.32 90 bottom
U$179  [QWIIC-LOGO-MEDIUM]  28.45,63.75 0 bottom
U$180  [INT#-[<]  24.64,60.2 90 top
U$181  [INT#-[<]  24.64,60.2 90 bottom
U$182  [PWR-()-03]  7.62,63.88 0 top
U$183  [ADR-()-03]  7.49,78.36 0 top
U$184  [I_SUPER2_C-()-03]  21.08,77.09 0 bottom
U$185  [BH17493]  23.88,69.6 0 bottom
U$186  [INT0]  27.56,74.8 0 bottom
U$187  [QWIIC_RGB2]  13.97,80.01 0 top
U$188  [QWIIC_RGB2]  25.02,71.37 0 bottom
U$189  [BH17493]  15.24,66.04 0 top
U$190  SPARKX-LOGO4  [SPARKX-MEDIUM]  45.47,82.17 0 bottom
U$191  SPARKX-LOGO4  [SPARKX-MEDIUM]  45.47,82.17 0 top
U$192  [3#3V2]  42.93,60.32 90 top
U$193  [GND1]  40.39,60.32 90 top
U$194  [SCL9]  48.01,60.32 90 top
U$195  [SDA8]  45.47,60.32 90 top
U$196  [GND1]  40.39,60.32 90 bottom
U$197  [3#3V2]  42.93,60.32 90 bottom
U$198  [SDA8]  45.47,60.32 90 bottom
U$199  [SCL9]  48.01,60.32 90 bottom
U$200  [QWIIC-LOGO-MEDIUM]  54.36,63.75 0 bottom
U$201  [INT#-[<]  50.55,60.2 90 top
U$202  [INT#-[<]  50.55,60.2 90 bottom
U$203  [PWR-()-03]  33.53,63.88 0 top
U$204  [ADR-()-03]  33.4,78.36 0 top
U$205  [I_SUPER2_C-()-03]  46.99,77.09 0 bottom
U$206  [BH17493]  49.78,69.6 0 bottom
U$207  [INT0]  53.47,74.8 0 bottom
U$208  [QWIIC_RGB2]  39.88,80.01 0 top
U$209  [QWIIC_RGB2]  50.93,71.37 0 bottom
U$210  [BH17493]  41.15,66.04 0 top
U$211  SPARKX-LOGO4  [SPARKX-MEDIUM]  71.37,82.17 0 bottom
U$212  SPARKX-LOGO4  [SPARKX-MEDIUM]  71.37,82.17 0 top
U$213  [3#3V2]  68.83,60.32 90 top
U$214  [GND1]  66.29,60.32 90 top
U$215  [SCL9]  73.91,60.32 90 top
U$216  [SDA8]  71.37,60.32 90 top
U$217  [GND1]  66.29,60.32 90 bottom
U$218  [3#3V2]  68.83,60.32 90 bottom
U$219  [SDA8]  71.37,60.32 90 bottom
U$220  [SCL9]  73.91,60.32 90 bottom
U$221  [QWIIC-LOGO-MEDIUM]  80.26,63.75 0 bottom
U$222  [INT#-[<]  76.45,60.2 90 top
U$223  [INT#-[<]  76.45,60.2 90 bottom
U$224  [PWR-()-03]  59.44,63.88 0 top
U$225  [ADR-()-03]  59.31,78.36 0 top
U$226  [I_SUPER2_C-()-03]  72.9,77.09 0 bottom
U$227  [BH17493]  75.69,69.6 0 bottom
U$228  [INT0]  79.38,74.8 0 bottom
U$229  [QWIIC_RGB2]  65.79,80.01 0 top
U$230  [QWIIC_RGB2]  76.84,71.37 0 bottom
U$231  [BH17493]  67.06,66.04 0 top
U$232  SPARKX-LOGO4  [SPARKX-MEDIUM]  97.28,82.17 0 bottom
U$233  SPARKX-LOGO4  [SPARKX-MEDIUM]  97.28,82.17 0 top
U$234  [3#3V2]  94.74,60.32 90 top
U$235  [GND1]  92.2,60.32 90 top
U$236  [SCL9]  99.82,60.32 90 top
U$237  [SDA8]  97.28,60.32 90 top
U$238  [GND1]  92.2,60.32 90 bottom
U$239  [3#3V2]  94.74,60.32 90 bottom
U$240  [SDA8]  97.28,60.32 90 bottom
U$241  [SCL9]  99.82,60.32 90 bottom
U$242  [QWIIC-LOGO-MEDIUM]  106.17,63.75 0 bottom
U$243  [INT#-[<]  102.36,60.2 90 top
U$244  [INT#-[<]  102.36,60.2 90 bottom
U$245  [PWR-()-03]  85.34,63.88 0 top
U$246  [ADR-()-03]  85.22,78.36 0 top
U$247  [I_SUPER2_C-()-03]  98.81,77.09 0 bottom
U$248  [BH17493]  101.6,69.6 0 bottom
U$249  [INT0]  105.28,74.8 0 bottom
U$250  [QWIIC_RGB2]  91.69,80.01 0 top
U$251  [QWIIC_RGB2]  102.74,71.37 0 bottom
U$252  [BH17493]  92.96,66.04 0 top
U$253  SPARKX-LOGO4  [SPARKX-MEDIUM]  19.56,108.08 0 bottom
U$254  SPARKX-LOGO4  [SPARKX-MEDIUM]  19.56,108.08 0 top
U$255  [3#3V2]  17.02,86.23 90 top
U$256  [GND1]  14.48,86.23 90 top
U$257  [SCL9]  22.1,86.23 90 top
U$258  [SDA8]  19.56,86.23 90 top
U$259  [GND1]  14.48,86.23 90 bottom
U$260  [3#3V2]  17.02,86.23 90 bottom
U$261  [SDA8]  19.56,86.23 90 bottom
U$262  [SCL9]  22.1,86.23 90 bottom
U$263  [QWIIC-LOGO-MEDIUM]  28.45,89.66 0 bottom
U$264  [INT#-[<]  24.64,86.11 90 top
U$265  [INT#-[<]  24.64,86.11 90 bottom
U$266  [PWR-()-03]  7.62,89.79 0 top
U$267  [ADR-()-03]  7.49,104.27 0 top
U$268  [I_SUPER2_C-()-03]  21.08,103 0 bottom
U$269  [BH17493]  23.88,95.5 0 bottom
U$270  [INT0]  27.56,100.71 0 bottom
U$271  [QWIIC_RGB2]  13.97,105.92 0 top
U$272  [QWIIC_RGB2]  25.02,97.28 0 bottom
U$273  [BH17493]  15.24,91.95 0 top
U$274  SPARKX-LOGO4  [SPARKX-MEDIUM]  45.47,108.08 0 bottom
U$275  SPARKX-LOGO4  [SPARKX-MEDIUM]  45.47,108.08 0 top
U$276  [3#3V2]  42.93,86.23 90 top
U$277  [GND1]  40.39,86.23 90 top
U$278  [SCL9]  48.01,86.23 90 top
U$279  [SDA8]  45.47,86.23 90 top
U$280  [GND1]  40.39,86.23 90 bottom
U$281  [3#3V2]  42.93,86.23 90 bottom
U$282  [SDA8]  45.47,86.23 90 bottom
U$283  [SCL9]  48.01,86.23 90 bottom
U$284  [QWIIC-LOGO-MEDIUM]  54.36,89.66 0 bottom
U$285  [INT#-[<]  50.55,86.11 90 top
U$286  [INT#-[<]  50.55,86.11 90 bottom
U$287  [PWR-()-03]  33.53,89.79 0 top
U$288  [ADR-()-03]  33.4,104.27 0 top
U$289  [I_SUPER2_C-()-03]  46.99,103 0 bottom
U$290  [BH17493]  49.78,95.5 0 bottom
U$291  [INT0]  53.47,100.71 0 bottom
U$292  [QWIIC_RGB2]  39.88,105.92 0 top
U$293  [QWIIC_RGB2]  50.93,97.28 0 bottom
U$294  [BH17493]  41.15,91.95 0 top
U$295  SPARKX-LOGO4  [SPARKX-MEDIUM]  71.37,108.08 0 bottom
U$296  SPARKX-LOGO4  [SPARKX-MEDIUM]  71.37,108.08 0 top
U$297  [3#3V2]  68.83,86.23 90 top
U$298  [GND1]  66.29,86.23 90 top
U$299  [SCL9]  73.91,86.23 90 top
U$300  [SDA8]  71.37,86.23 90 top
U$301  [GND1]  66.29,86.23 90 bottom
U$302  [3#3V2]  68.83,86.23 90 bottom
U$303  [SDA8]  71.37,86.23 90 bottom
U$304  [SCL9]  73.91,86.23 90 bottom
U$305  [QWIIC-LOGO-MEDIUM]  80.26,89.66 0 bottom
U$306  [INT#-[<]  76.45,86.11 90 top
U$307  [INT#-[<]  76.45,86.11 90 bottom
U$308  [PWR-()-03]  59.44,89.79 0 top
U$309  [ADR-()-03]  59.31,104.27 0 top
U$310  [I_SUPER2_C-()-03]  72.9,103 0 bottom
U$311  [BH17493]  75.69,95.5 0 bottom
U$312  [INT0]  79.38,100.71 0 bottom
U$313  [QWIIC_RGB2]  65.79,105.92 0 top
U$314  [QWIIC_RGB2]  76.84,97.28 0 bottom
U$315  [BH17493]  67.06,91.95 0 top
U$316  SPARKX-LOGO4  [SPARKX-MEDIUM]  97.28,108.08 0 bottom
U$317  SPARKX-LOGO4  [SPARKX-MEDIUM]  97.28,108.08 0 top
U$318  [3#3V2]  94.74,86.23 90 top
U$319  [GND1]  92.2,86.23 90 top